# Altium PCB Fonte_Chaveada_ISL6236.PcbDoc
Units mm, origin at the board's own origin, x right, y up, seen from the top; angles counter-clockwise.
Board outline 50 x 50 mm, 6 copper layers (L1, L2(GND), L3, L4, L5(GND), L6), stack 1.297 mm thick; 41 components, 27 nets, 119 pads, 103 vias.
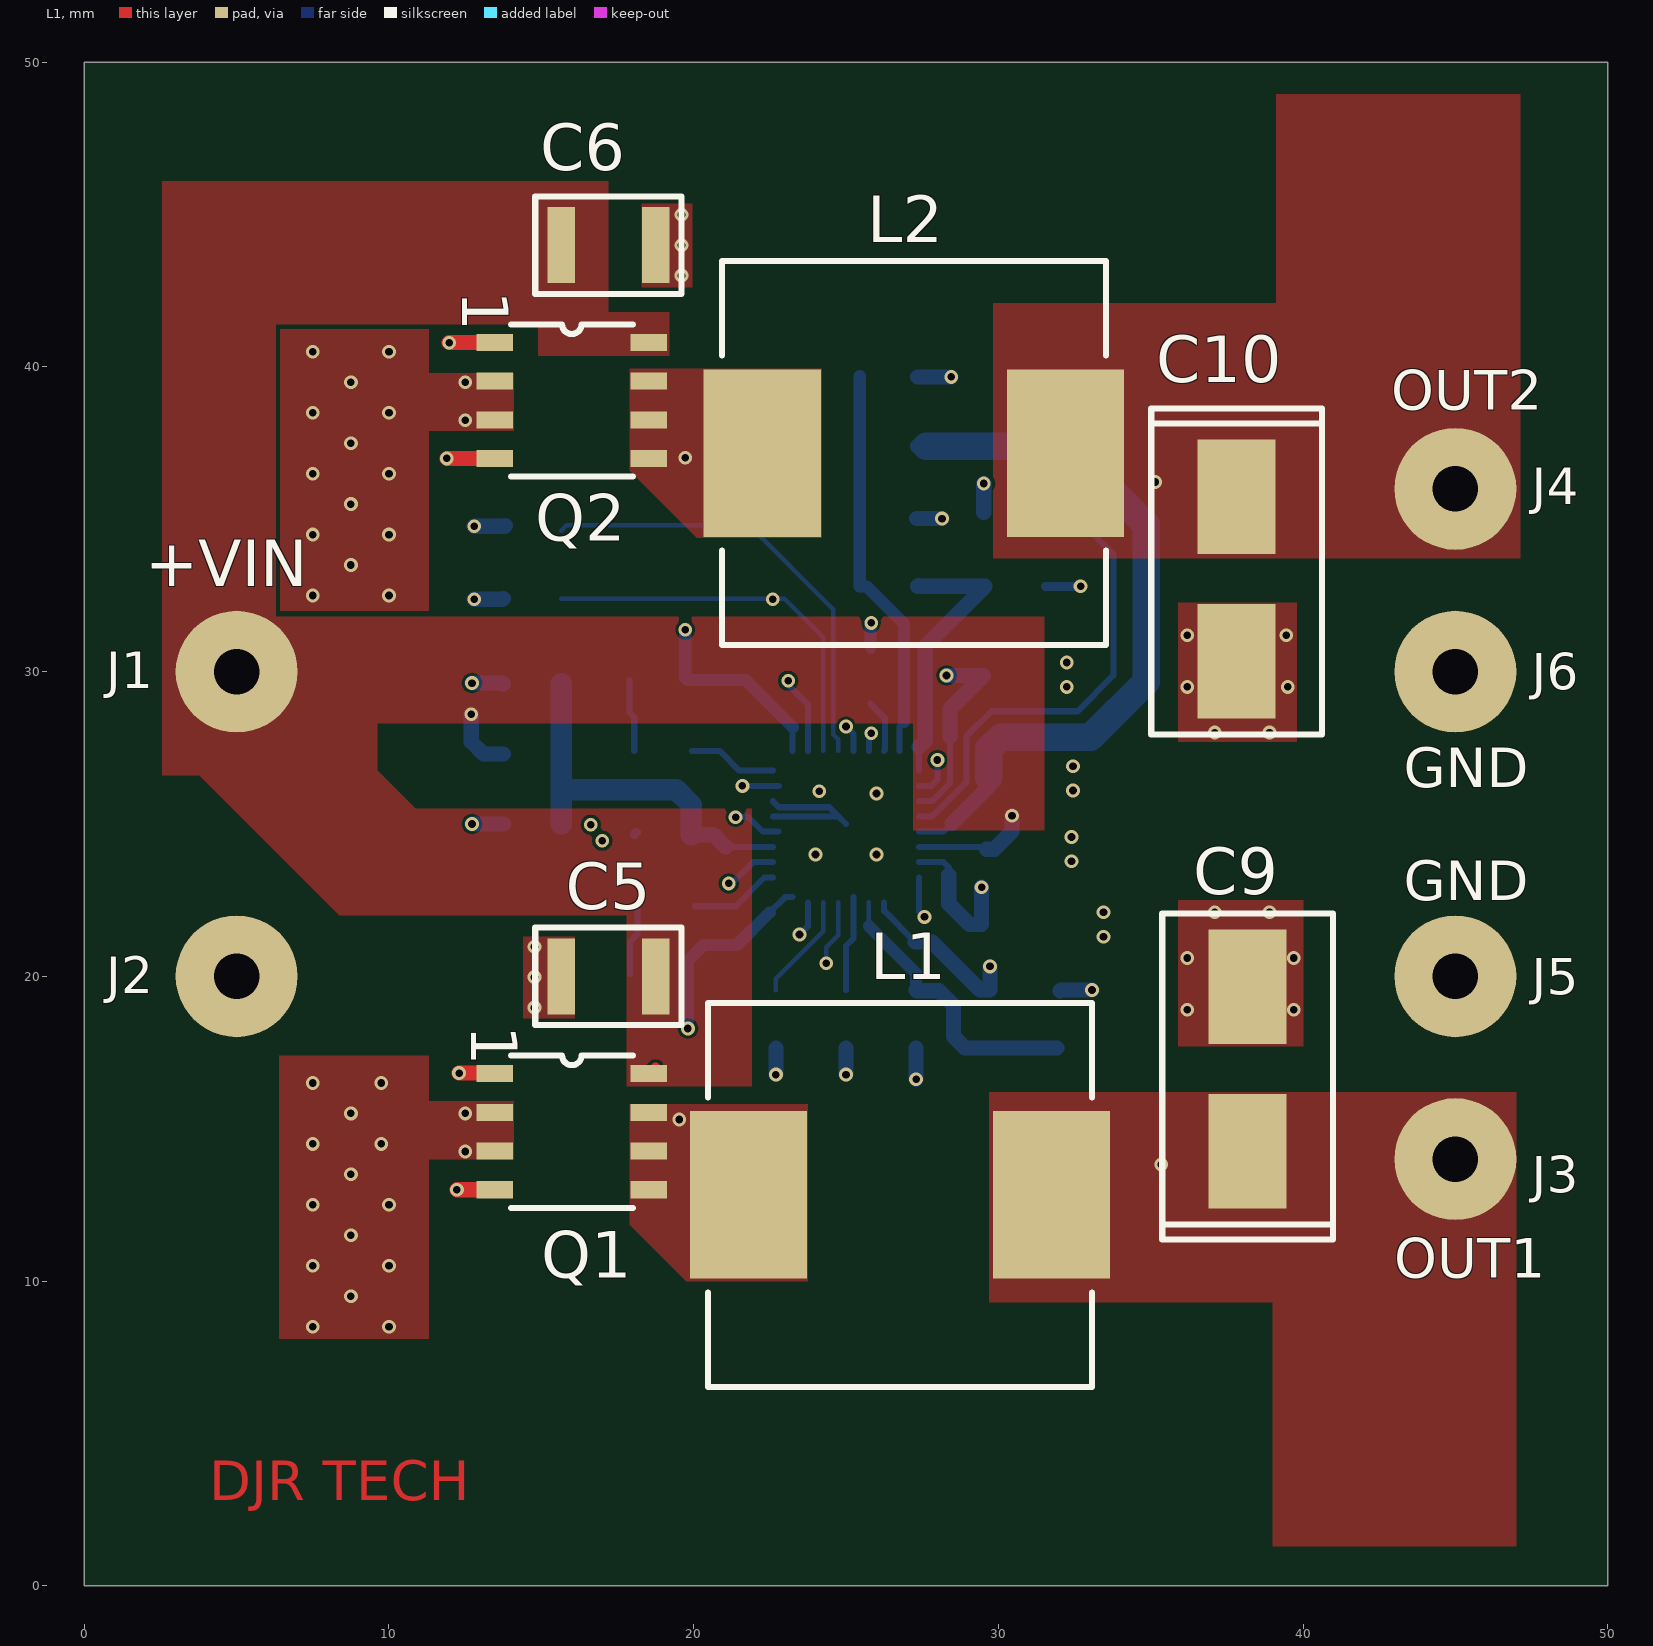
[diagram p0: L1 view]
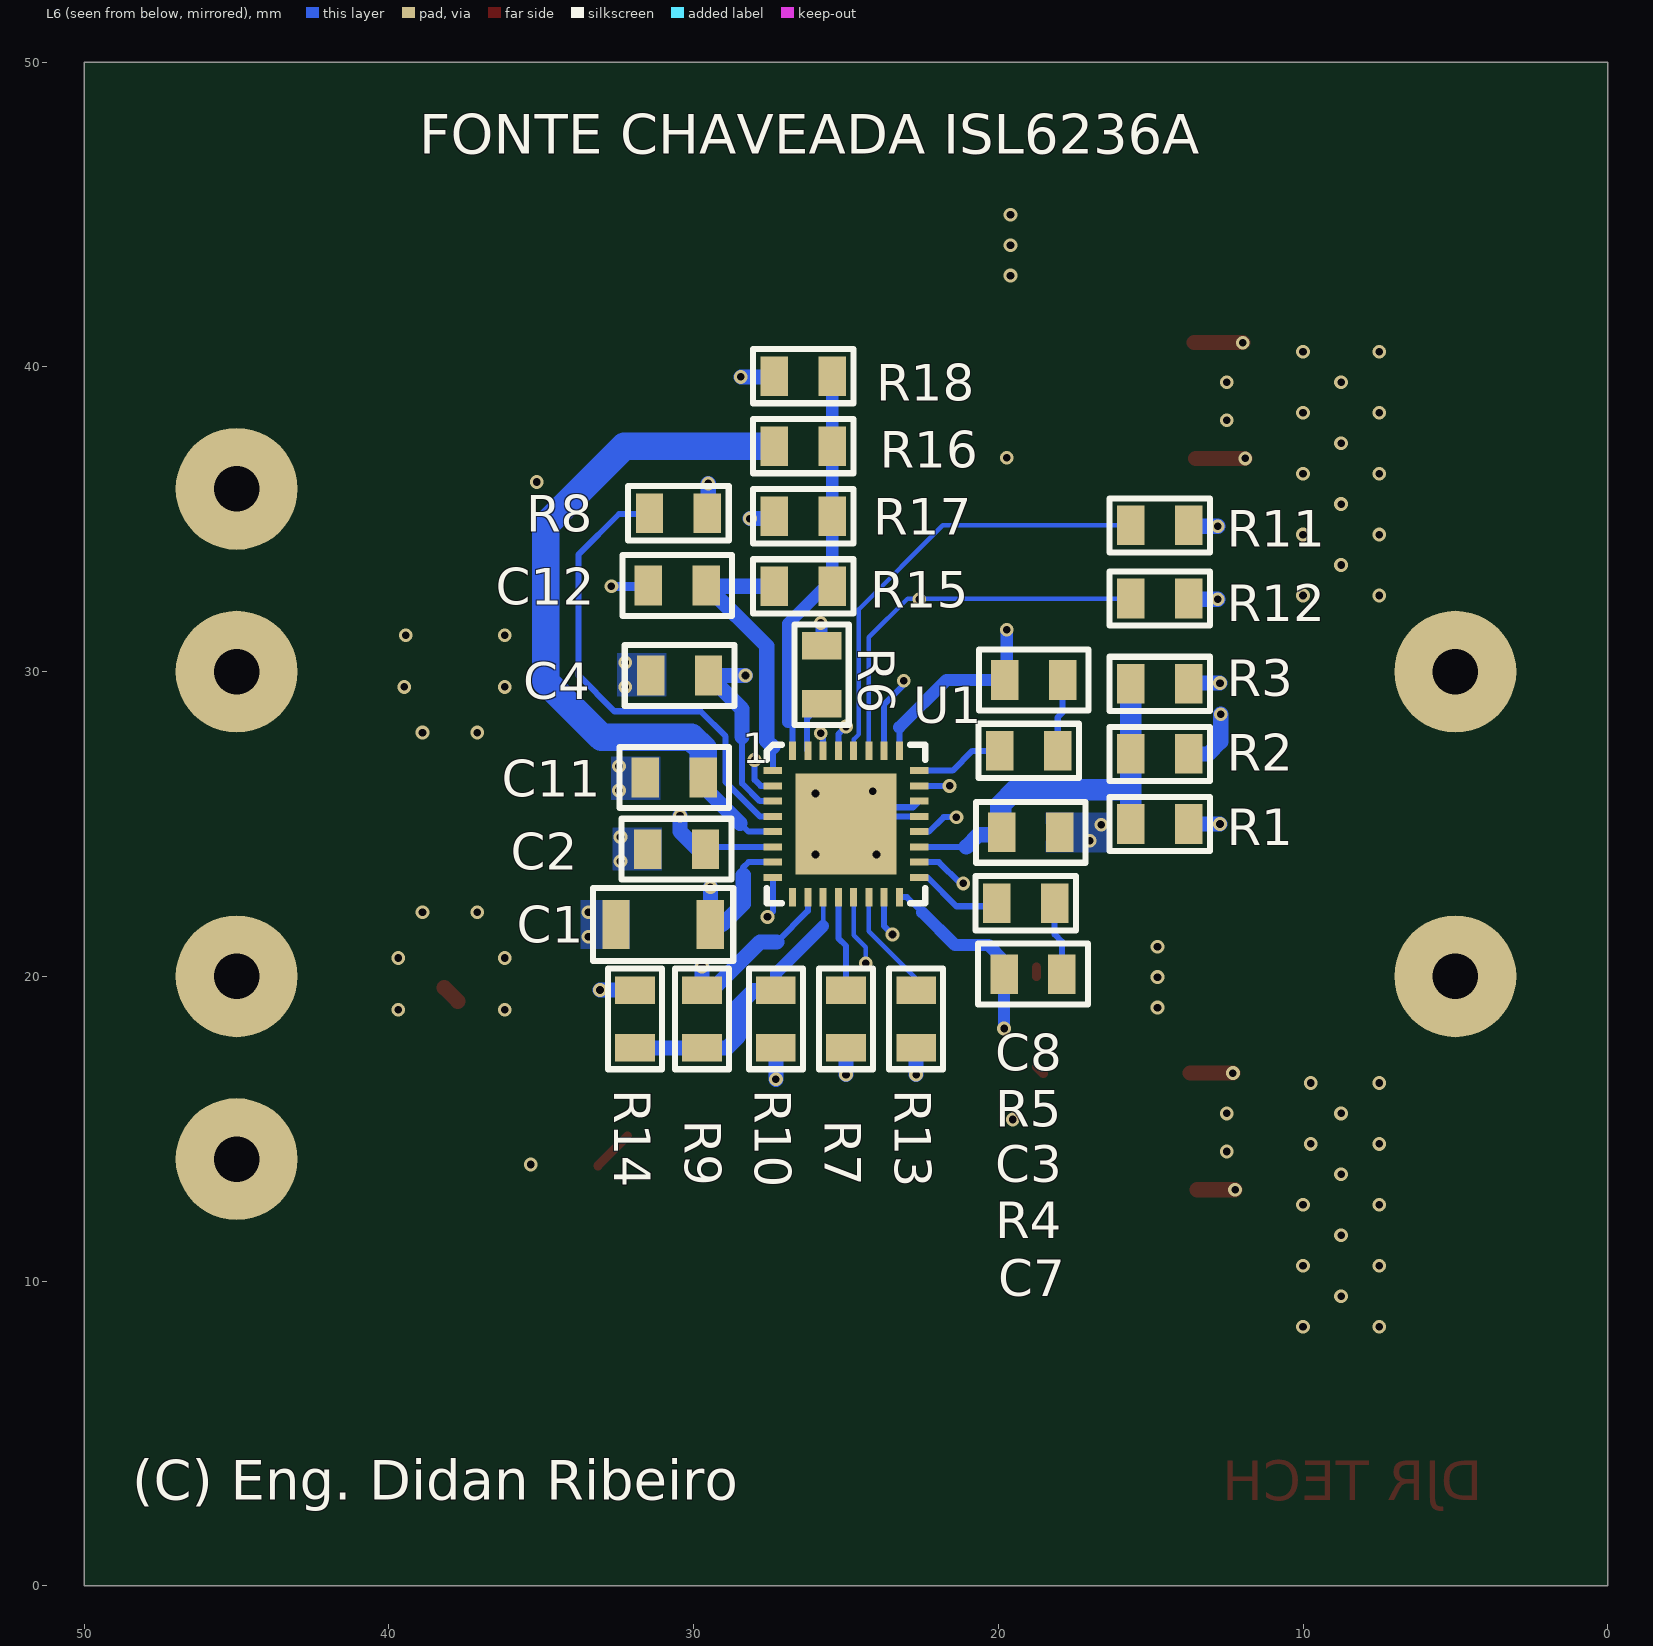
[diagram p1: L6 view, seen from below]
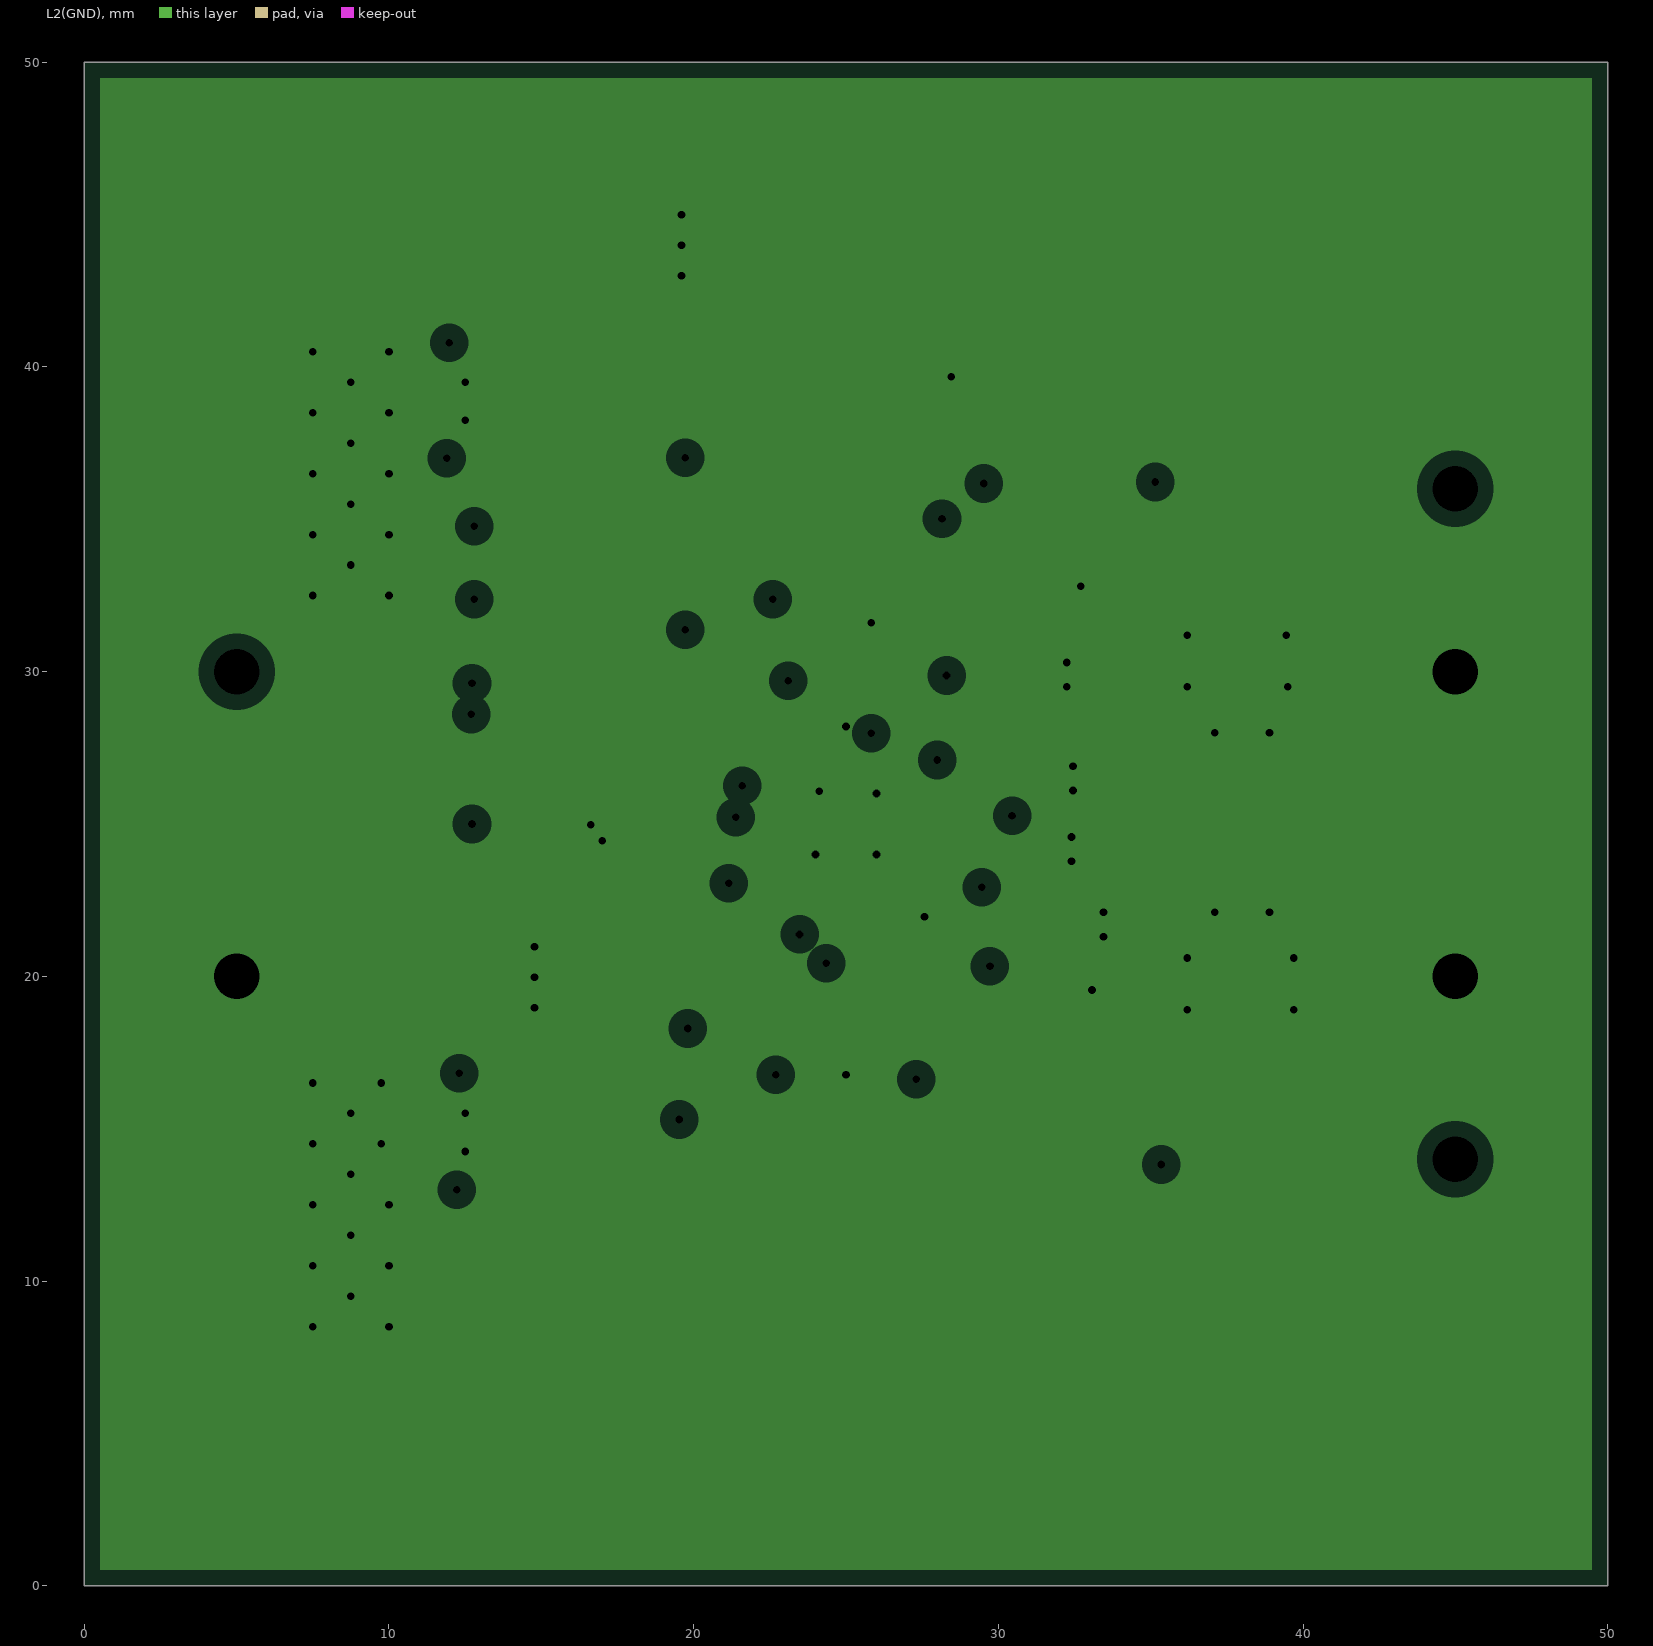
[diagram p2: L2(GND), clearances drawn from the general rule]
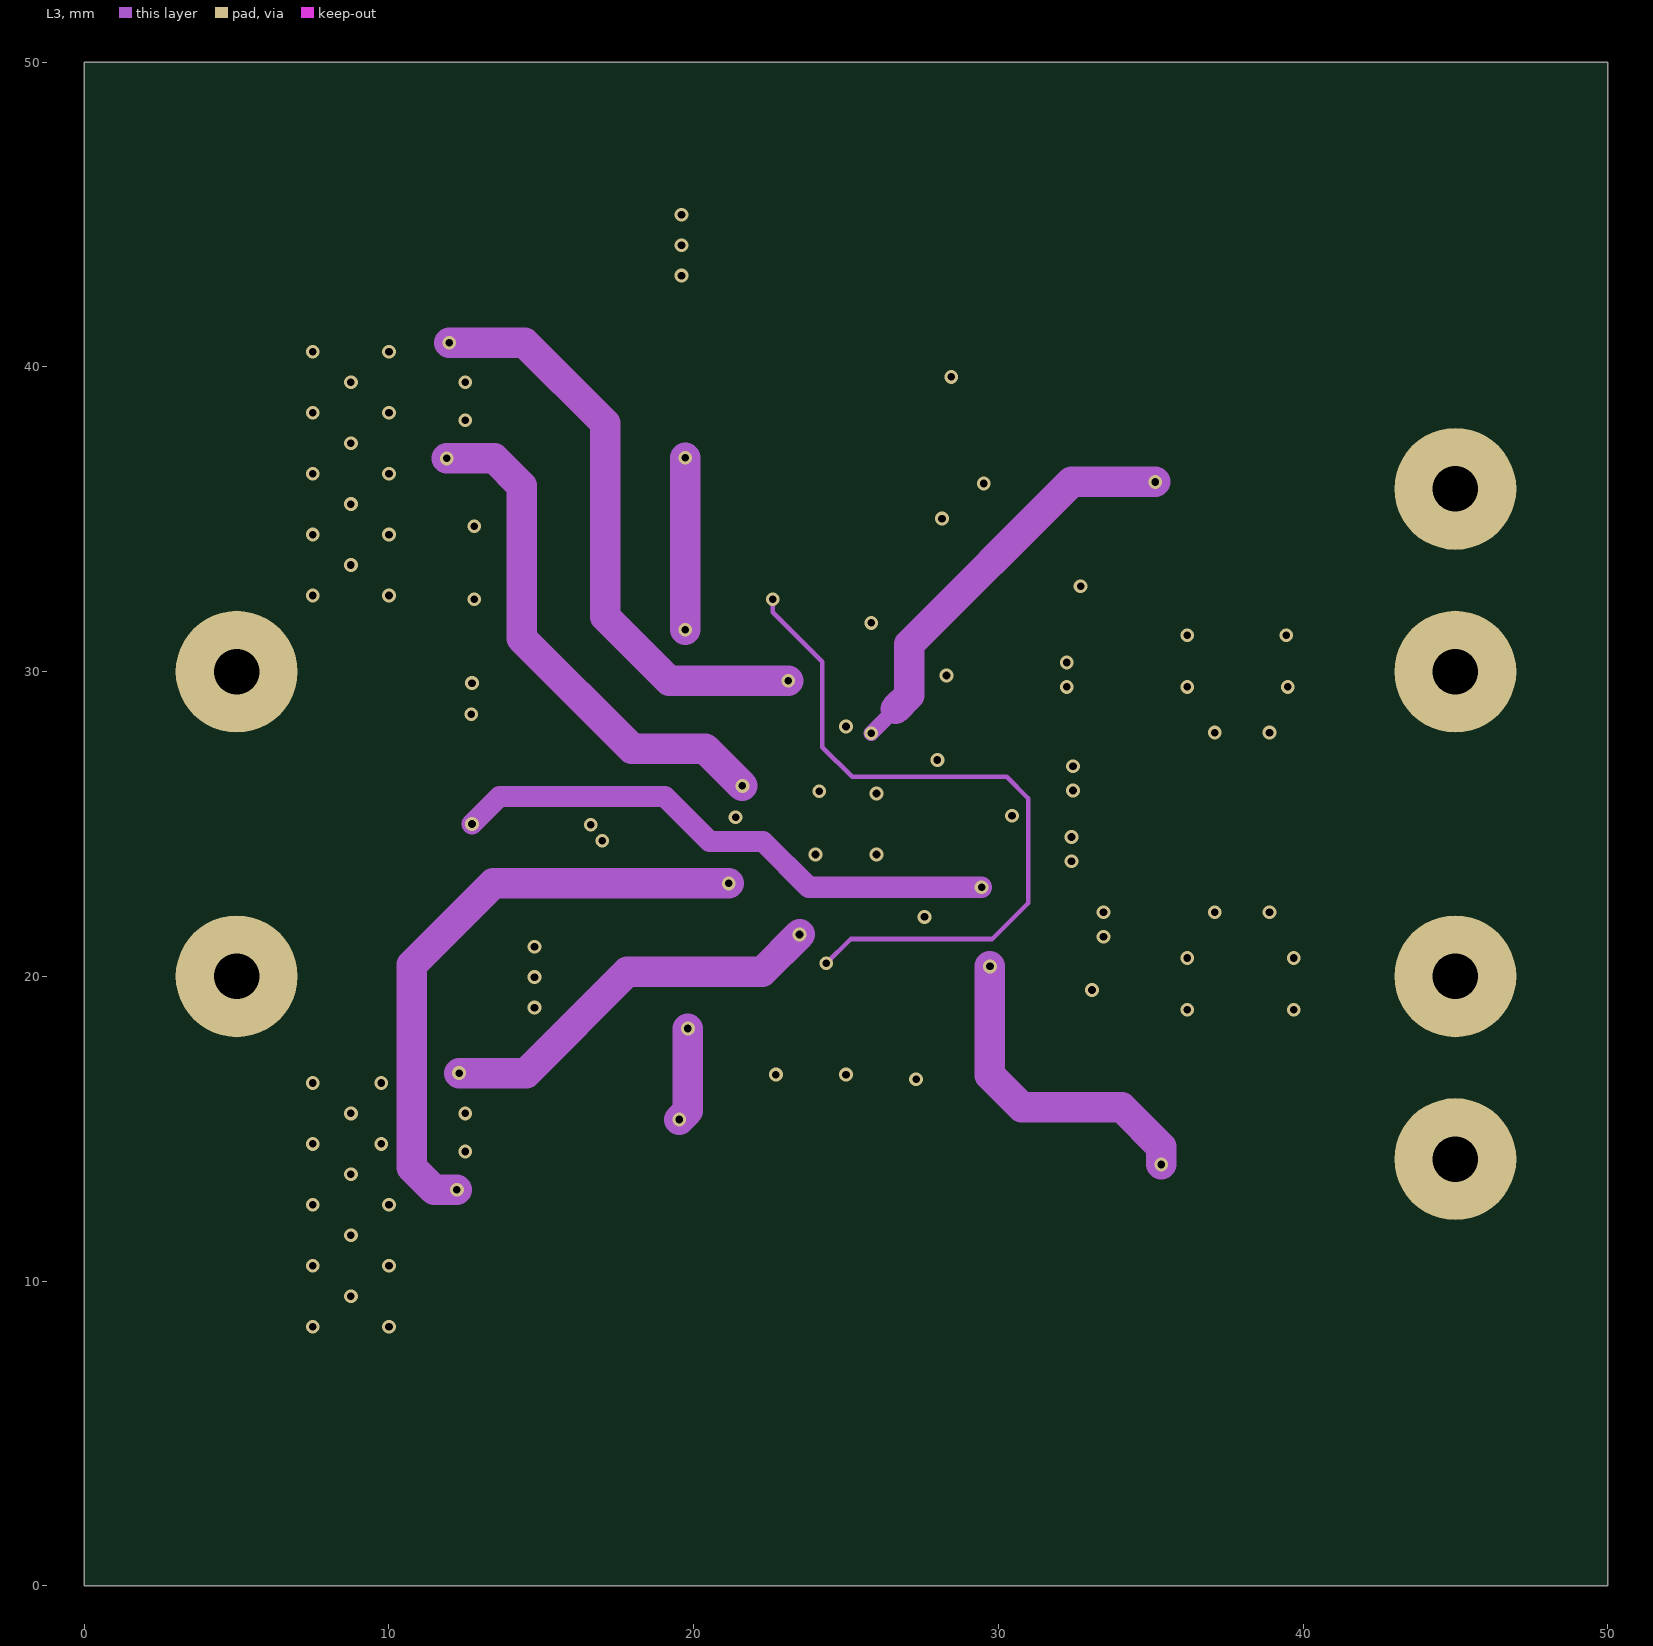
[diagram p3: L3]
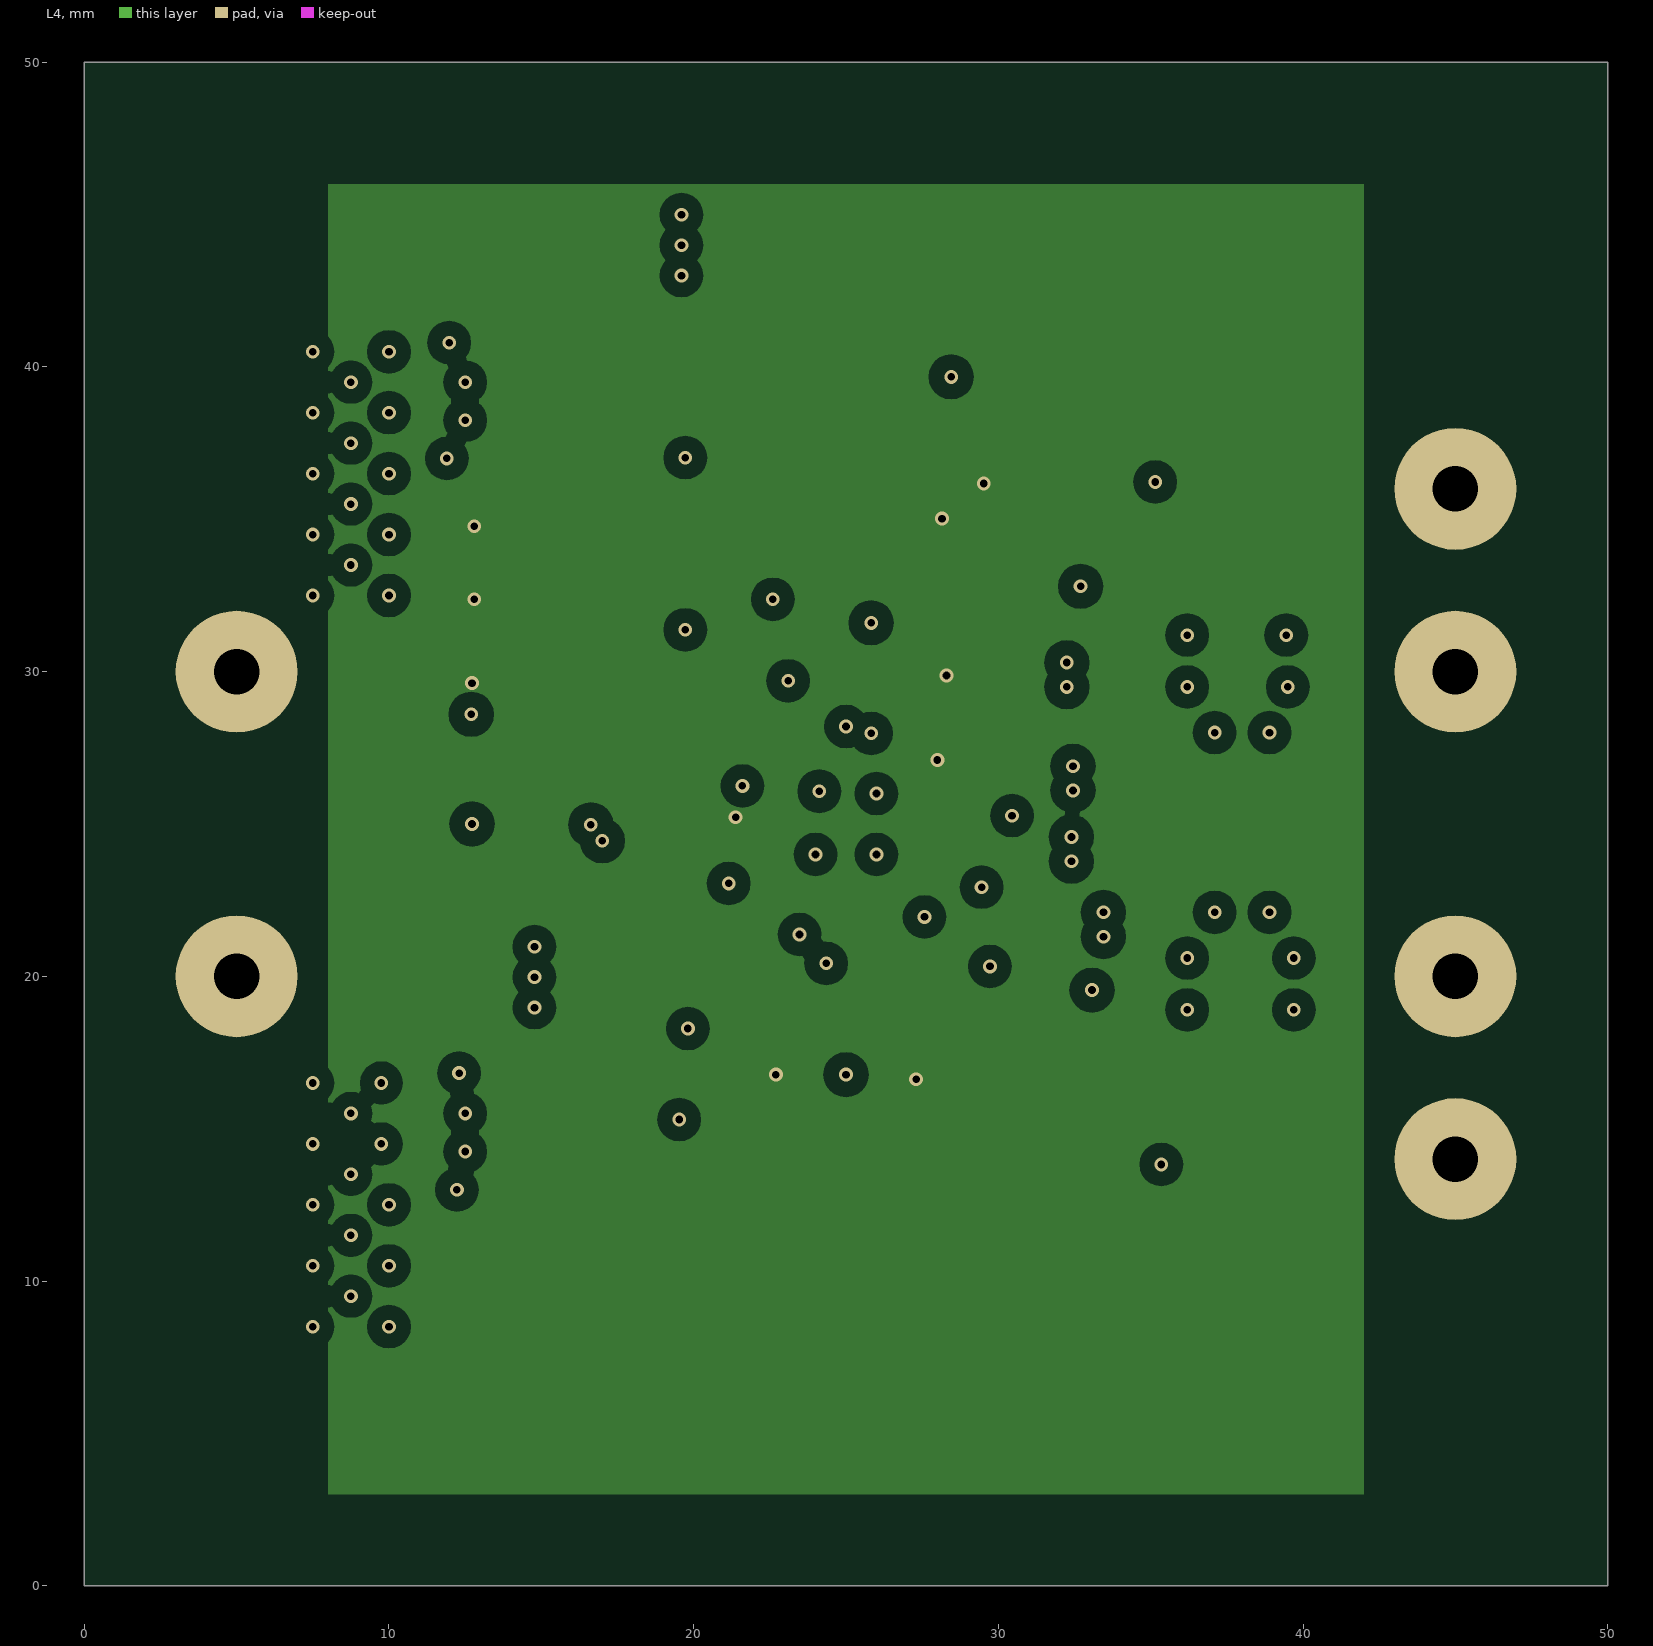
[diagram p4: L4]
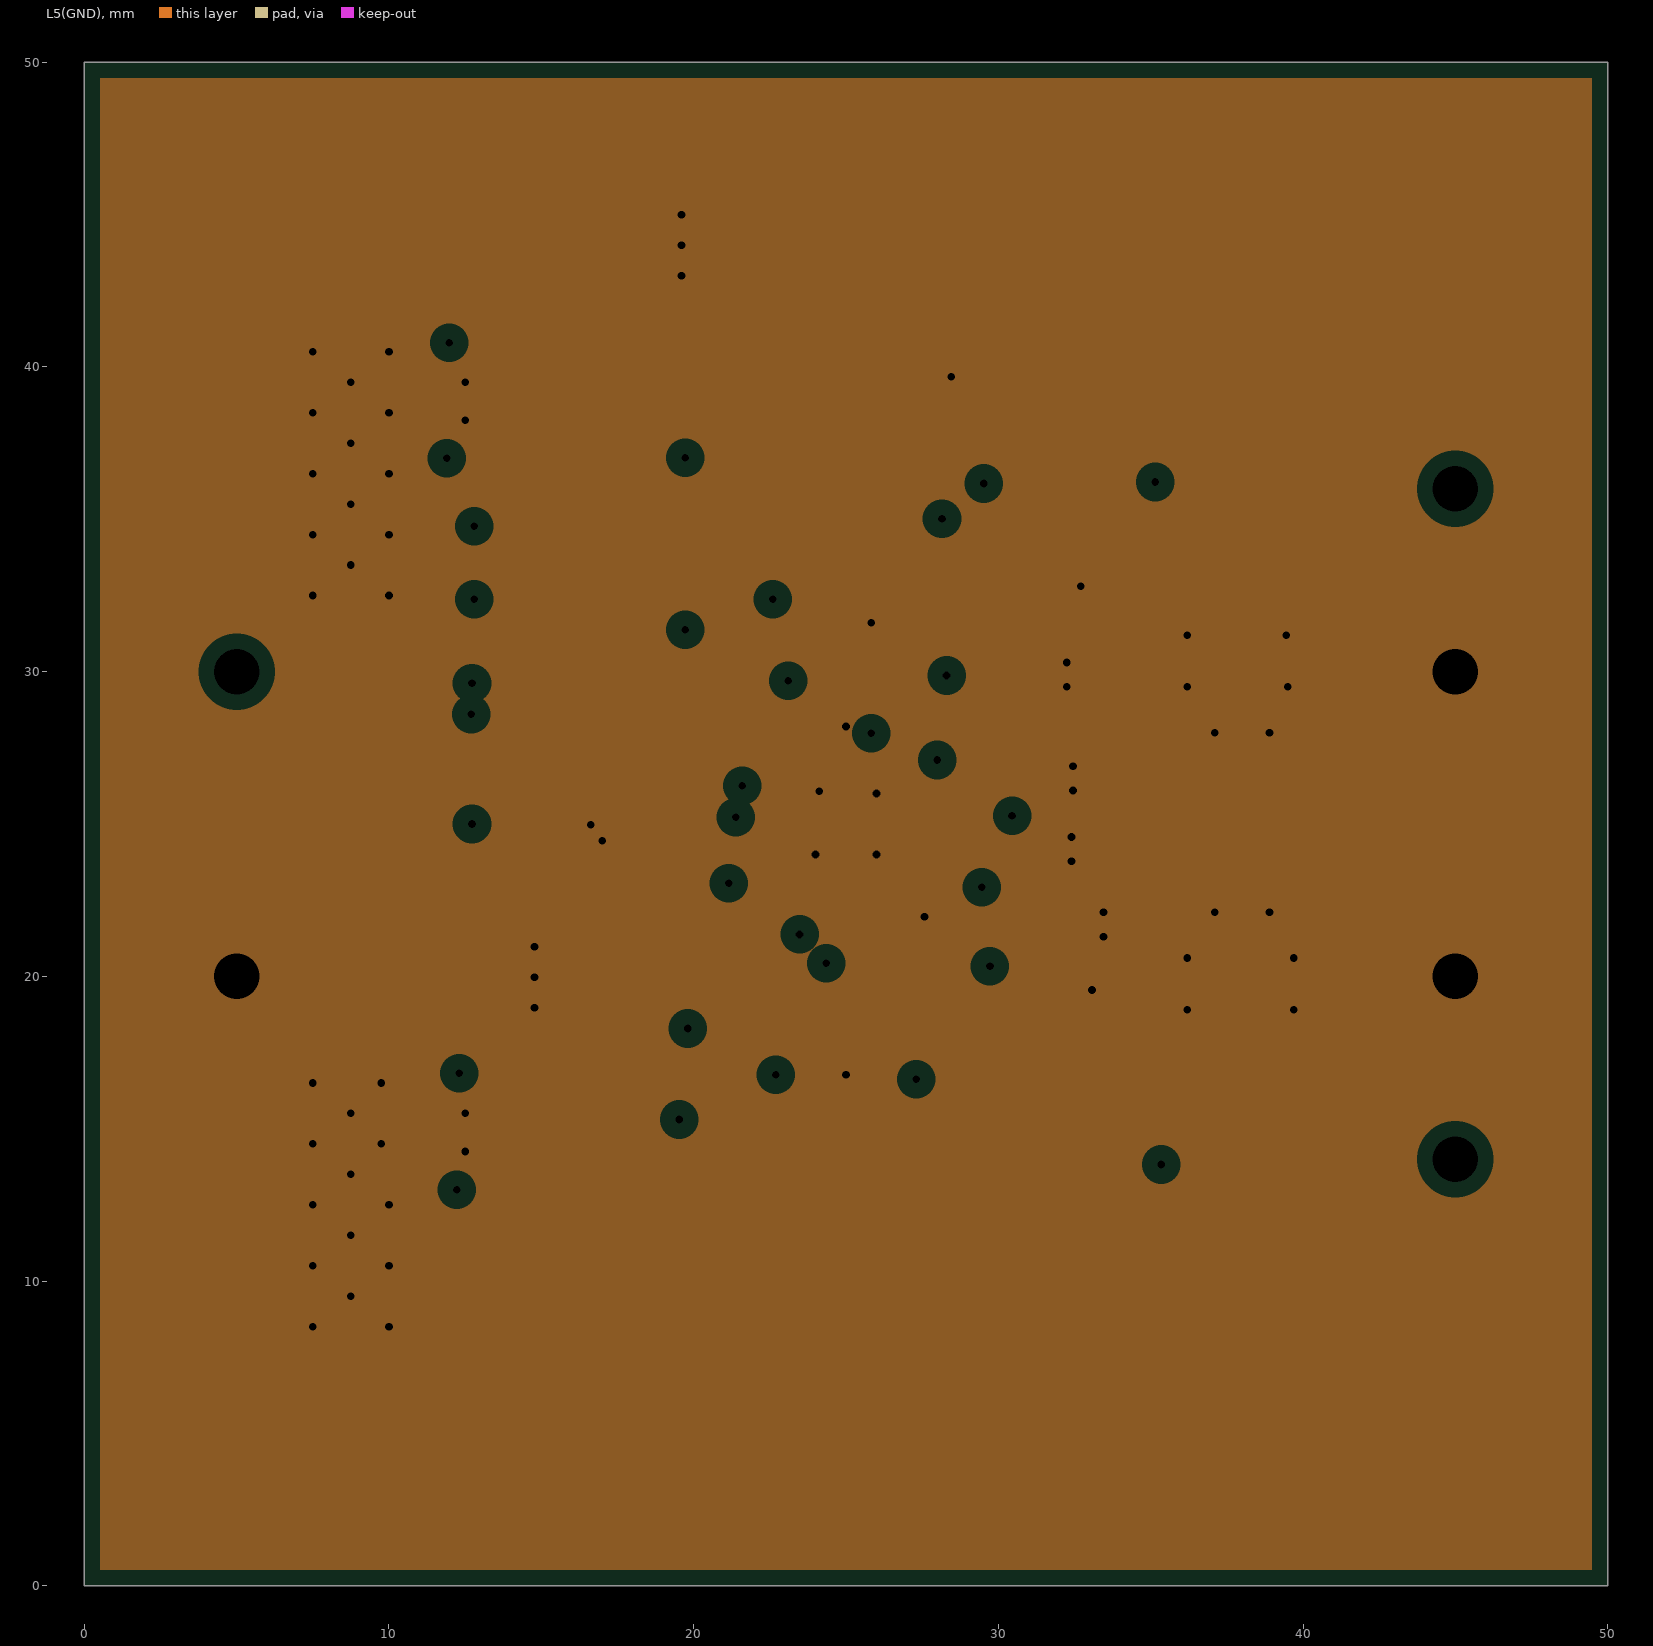
[diagram p5: L5(GND), clearances drawn from the general rule]
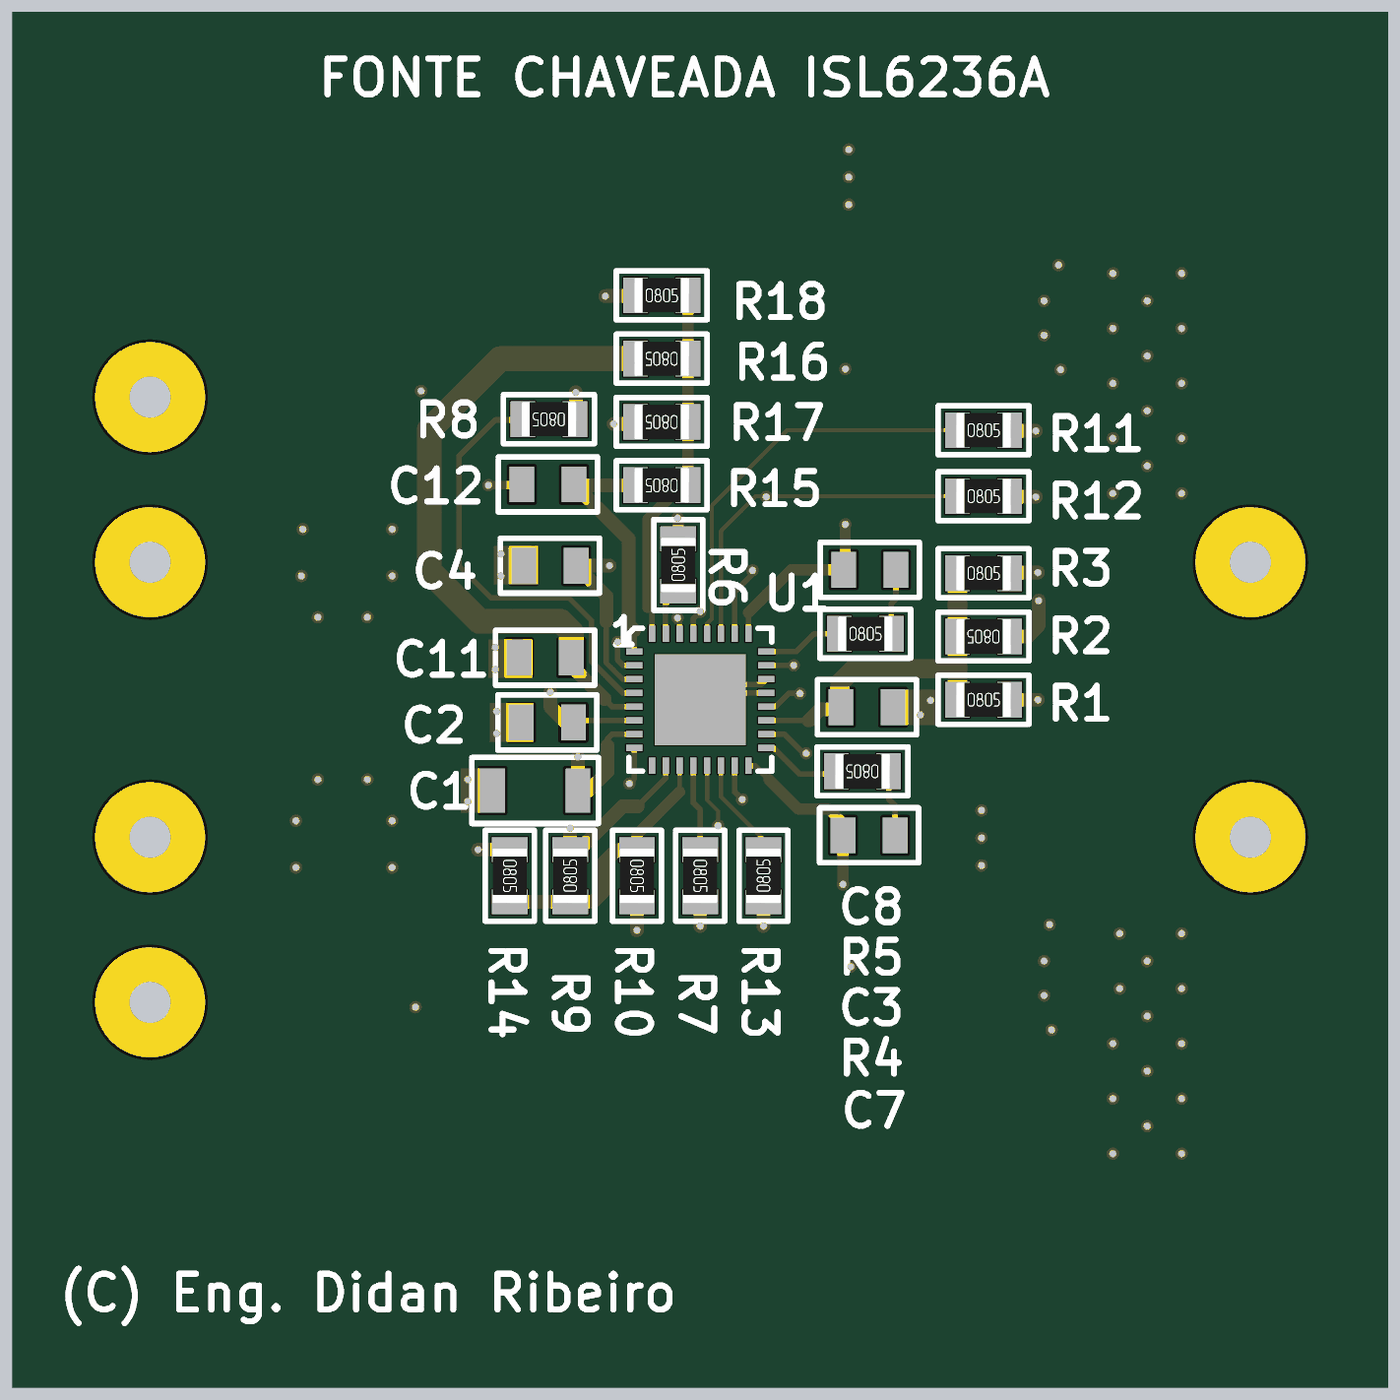
[diagram p6: 3D render of the assembled board from below, using the file's embedded part models]

## Layer stack, top to bottom
Top Solder: solder mask 0.0102, Solder Resist, Dk 3.5
L1: signal copper 0.0356
Dielectric 1: core 0.32, FR-4, Dk 4.8
L2(GND): plane copper 0.036, net GND
Dielectric 3: prepreg 0.127, Dk 4.2
L3: signal copper 0.036
Dielectric 6: core 0.254, Dk 4.2
L4: signal copper 0.036
Dielectric 5: prepreg 0.127, Dk 4.2
L5(GND): plane copper 0.036, net GND
Dielectric 4: core 0.254, Dk 4.2
L6: signal copper 0.0356
Bottom Solder: solder mask 0.0102, Solder Resist, Dk 3.5

## Board outline
0,0 50,0 50,50 0,50

## Design rules (kind name [scope] priority, off if disabled: settings)
Clearance [All] p1: gap=0.1 ignorepadtopadclearanceinfootprint=FALSE
ComponentClearance [All] p1: gap=0.05 collisioncheckmode=3 verticalgap=0.05 showdistances=FALSE
HoleSize [All] p1: absolutevalues=TRUE maxlimit=10 minlimit=0.025 maxpercent=80.000 minpercent=20.000
MinimumSolderMaskSliver [All] p1: minsoldermaskwidth=0
PlaneClearance [All] p1: clearance=0.508
PlaneConnect PlaneConnect_VIA [IsVia] p1: planeconnectstyle=Direct reliefexpansion=0.508 reliefentries=4 reliefconductorwidth=0.254 reliefairgap=0.254
PlaneConnect [All] p2: planeconnectstyle=Direct reliefexpansion=0.508 reliefentries=4 reliefconductorwidth=0.254 reliefairgap=0.254
PolygonConnect [All] p1: connectstyle=Direct reliefconductorwidth=0.254 reliefentries=4 polygonreliefangle="90 Angle" airgapwidth=0.254
RoutingVias [All] p1: holewidth=0.2 width=0.45 viastyle="Through Hole" minholewidth=0.1 minwidth=0.4 maxholewidth=10 maxwidth=10
SilkToSilkClearance [All] p1: silktosilkclearance=0.1
SilkToSolderMaskClearance [IsPad] p1: minsilkscreentomaskgap=0.1 clearancetoexposedcopper=TRUE
SolderMaskExpansion [All] p1: expansion=0.102
Width [All] p1: maxlimit=10 minlimit=0.1 preferedwidth=0.15
23 further rules are at their usual default settings.

## Components (designator, comment, footprint, x,y, rotation, side; value= is the part's Value field where it differs from the comment)
C1 "4.7uF, 10V" C1206 31.1,21.7 r180 bottom
C2 "1uF, 50V" C0805 30.6,24.2 r180 bottom locked
C3 "1uF, 50V" C0805 18.9,24.7 r0 bottom
C4 "1uF, 50V" C0805 30.5,29.9 r180 bottom locked
C5 "10uF, 50V" C1210 17.2,20 r0 top locked
C6 "10uF, 50V" C1210 17.2,44 r180 top locked
C7 "100nF" C0805 18.9,20.1 r180 bottom locked
C8 "220nF" C0805 18.8,29.7 r0 bottom
C9 "330uF, 10V" 7343-43 38,17 r90 top locked
C10 "330uF, 10V" 7343-43 38,33 r270 top locked
C11 "10nF" C0805 30.6,26.5 r0 bottom locked
C12 "100nF" C0805 30.5,32.8 r0 bottom
J1 "4MMx1.5MM" PAD#1 7.925,31.625 r0 top
J2 "4MMx1.5MM" PAD#2 7.725,23.767 r0 top locked
J3 "4MMx1.5MM" PAD#3 45.225,13.475 r0 top
J4 "4MMx1.5MM" PAD#4 45.025,35.575 r0 top
J5 "4MMx1.5MM" PAD#5 45.025,20.475 r0 top
J6 "4MMx1.5MM" PAD#6 45.225,30.475 r0 top
L1 "3u3, DR125-3R3-R" DR125 27,13 r180 top locked
L2 "2u2, DR125-2R2-R" DR125 27,37 r0 top locked
Q1 "SI4816BDY-T1-GE3" SO-8 16,15 r0 top locked
Q2 "SI4816BDY-T1-GE3" SO-8 16,39 r0 top locked
R1 "0R" R0805 14.7,25 r180 bottom
R2 "0R" R0805 14.7,27.3 r0 bottom
R3 "10R" R0805 14.7,29.6 r180 bottom
R4 "1R" R0805 19.1,22.4 r0 bottom
R5 "1R" R0805 19,27.4 r180 bottom
R6 "200k" R0805 25.8,29.9 r90 bottom
R7 "200k" R0805 25,18.6 r270 bottom
R8 "10k" R0805 30.5,35.2 r0 bottom
R9 "DNF" R0805 29.725,18.6 r90 bottom
R10 "0R" R0805 27.3,18.6 r270 bottom
R11 "200k" R0805 14.7,34.8 r180 bottom
R12 "200k" R0805 14.7,32.4 r180 bottom
R13 "10k" R0805 22.7,18.6 r90 bottom
R14 "DNF" R0805 31.925,18.6 r270 bottom
R15 "DNF" R0805 26.4,32.8 r0 bottom locked
R16 "0R" R0805 26.4,37.4 r0 bottom
R17 "DNF" R0805 26.4,35.1 r0 bottom
R18 "DNF" R0805 26.4,39.7 r180 bottom
U1 "ISL6236AIRZ" L32.5x5B 25,25 r180 bottom locked

## Footprints (in the part's own frame and the unit in brackets; to place one, negate y for a bottom-side part, rotate by r counter-clockwise, add the part's x,y. Pads: shape width x height; smd on the part's side, far side on the other; paste and mask are expansions set on the pad)
7343-43 [mm]
  rect 3.75x2.55 smd: 1(-2.74,-0.181) 2(2.66,-0.181)
  silkscreen extent -5.64,-2.98 5.06,2.62
C0805 [mm]
  rect 0.9x1.3 smd: 1(-0.912,-0.027) 2(0.988,-0.027)
  silkscreen extent -1.76,-1.03 1.84,0.97
C1206 [mm]
  rect 0.9x1.6 smd: 1(-1.45,0) 2(1.65,0)
  silkscreen extent -2.2,-1.2 2.4,1.2
C1210 [mm]
  rect 0.9x2.5 smd: 1(-1.55,0) 2(1.55,0)
  silkscreen extent -2.4,-1.6 2.4,1.6
DR125 [mm]
  rect 3.85x5.5 smd: 1(-4.747,0.173) 2(5.203,0.173)
  silkscreen extent -6.07,-6.13 6.53,6.47
L32.5x5B [mm]
  rect 0.6x0.23 smd mask+0.05: 1(-2.4,1.75) 2(-2.4,1.25) 3(-2.4,0.75) 4(-2.4,0.25) 5(-2.4,-0.25) 6(-2.4,-0.75) 7(-2.4,-1.25) 8(-2.4,-1.75) 17(2.4,-1.75) 18(2.4,-1.25) 19(2.4,-0.75) 20(2.4,-0.25) 21(2.4,0.25) 22(2.4,0.75) 23(2.4,1.25) 24(2.4,1.75)
  rect 0.23x0.6 smd mask+0.05: 9(-1.75,-2.4) 10(-1.25,-2.4) 11(-0.75,-2.4) 12(-0.25,-2.4) 13(0.25,-2.4) 14(0.75,-2.4) 15(1.25,-2.4) 16(1.75,-2.4) 25(1.75,2.4) 26(1.25,2.4) 27(0.75,2.4) 28(0.25,2.4) 29(-0.25,2.4) 30(-0.75,2.4) 31(-1.25,2.4) 32(-1.75,2.4)
  rect 3.3x3.3 smd mask+0.05: 33(0,0)
  silkscreen extent -2.6,-2.6 2.6,2.6
PAD#1 [mm]
  round 4 hole 1.5: 1(-2.925,-1.625)
PAD#2 [mm]
  round 4 hole 1.5: 1(-2.725,-3.767)
PAD#3 [mm]
  round 4 hole 1.5: 1(-0.225,0.525)
PAD#4 [mm]
  round 4 hole 1.5: 1(-0.025,0.425)
PAD#5 [mm]
  round 4 hole 1.5: 1(-0.025,-0.475)
PAD#6 [mm]
  round 4 hole 1.5: 1(-0.225,-0.475)
R0805 [mm]
  rect 0.9x1.3 smd mask+0.05: 1(-0.95,0) 2(0.95,0)
  silkscreen extent -1.65,-0.89 1.65,0.89, body extent -1,-0.62 1,0.63, height 0.46
SO-8 [mm]
  rect 1.194x0.559 smd: 1(-2.527,1.805) 2(-2.527,0.535) 3(-2.527,-0.735) 4(-2.527,-2.005) 5(2.527,-2.005) 6(2.527,-0.735) 7(2.527,0.535) 8(2.527,1.805)
  silkscreen extent -2,-2.6 2,2.4

## Part data
C1: library part C3216X5R1A475K, "4.7µF ±10% 10V X5R Ceramic Capacitor -55°C ~ 85°C Surface Mount, MLCC 1206 (3216 Metric) 0.126\" L x 0.063\" W (3.20mm x 1.60mm)", Capacitance=4.7uF, Case/Package=1206, Case Code (Metric)=3216, Dielectric=X5R, Dielectric Material=Ceramic, Manufacturer=TDK, Max Operating Temperature=85°C, Min Operating Temperature=-55°C, Package Quantity=2000, Supplier Part Number 1=445-1386-6-ND, Tolerance=10%, Voltage Rating=10V, Case Code (Imperial)=1206, ComponentLink1Description=https://media.digikey.com/pdf/Data%20Sheets/TDK%20PDFs/C_Series_GeneralAppl_Spec_rev_0.3_201012.pdf, ComponentLink1URL=https://media.digikey.com/pdf/Data%20Sheets/TDK%20PDFs/C_Series_GeneralAppl_Spec_rev_0.3_201012.pdf, ComponentLink2Description=https://www.verical.com/server-webapp/html/getDatasheet?partID=178730, ComponentLink2URL=https://www.verical.com/server-webapp/html/getDatasheet?partID=178730, ComponentLink3Description=http://www.tdk.co.jp/tefe02/e412_c.pdf, ComponentLink3URL=http://www.tdk.co.jp/tefe02/e412_c.pdf, ComponentLink4Description=http://www.mouser.com/ds/2/400/tdk_mlcc_commercial_general_en-542463.pdf, ComponentLink4URL=http://www.mouser.com/ds/2/400/tdk_mlcc_commercial_general_en-542463.pdf, ComponentLink5Description=http://www.farnell.com/datasheets/1571323.pdf, ComponentLink5URL=http://www.farnell.com/datasheets/1571323.pdf, ComponentLink6Description=http://www.onlinecomponents.com/productFiles/mf-TDK/e412_c.pdf, ComponentLink6URL=http://www.onlinecomponents.com/productFiles/mf-TDK/e412_c.pdf, Depth=1.6mm, Lead Free="Lead Free", Length=3.2mm, Manufacturer Part Number=C3216X5R1A475K, Mount="Surface Mount", Number of Pins=2, Packaging="Tape and Reel", Radiation Hardening=No, Stock 1=0, Supplier 1=Digi-Key, Termination=SMD/SMT, Thickness=0.071inch, Voltage Rating (DC)=10V, Width=0.063inch
C2 C3 C4: library part C2012X7R1H105K125AB, "CAP CER 1UF 50V X7R 0805", Capacitance=1uF, Case/Package=0805, Case Code (Metric)=2012, Dielectric=X7R, Dielectric Material=Ceramic, Manufacturer=TDK, Max Operating Temperature=125°C, Min Operating Temperature=-55°C, Package Quantity=1, Supplier Part Number 1=445-7547-6-ND, Tolerance=10%, Voltage Rating=50V, Case Code (Imperial)=0805, ComponentLink1Description=http://www.farnell.com/datasheets/1796654.pdf, ComponentLink1URL=http://www.farnell.com/datasheets/1796654.pdf, ComponentLink2Description=https://product.tdk.com/info/en/catalog/spec/mlccspec_commercial_general_midvoltage_en.pdf, ComponentLink2URL=https://product.tdk.com/info/en/catalog/spec/mlccspec_commercial_general_midvoltage_en.pdf, ComponentLink3Description=http://www.tdk.com/pdf/general_B11.pdf, ComponentLink3URL=http://www.tdk.com/pdf/general_B11.pdf, ComponentLink4Description=http://www.mouser.com/ds/2/400/lcc_commercial_general_en-837201.pdf, ComponentLink4URL=http://www.mouser.com/ds/2/400/lcc_commercial_general_en-837201.pdf, ComponentLink5Description=http://www.farnell.com/datasheets/2291921.pdf, ComponentLink5URL=http://www.farnell.com/datasheets/2291921.pdf, ComponentLink6Description=http://product.tdk.com/capacitor/mlcc/en/documents/mlcc_commercial_general_en.pdf, ComponentLink6URL=http://product.tdk.com/capacitor/mlcc/en/documents/mlcc_commercial_general_en.pdf, Composition=Ceramic, Depth=1.25mm, Height=1.25mm, Lead Free="Lead Free", Length=2mm, Manufacturer Part Number=C2012X7R1H105K125AB, Mount="Surface Mount", Number of Pins=2, Packaging="Tape and Reel", Pricing 1="1=0.42, 10=0.286, 100=0.1619, 500=0.1143, 1000=0.1 (USD)", Radiation Hardening=No, REACH SVHC="No SVHC", Stock 1=20000, Supplier 1=Digi-Key, Termination=SMD/SMT, Thickness=0.057inch, Voltage Rating (DC)=50V, Weight=0.000194oz, Width=0.049inch
C5 C6: library part UMK325BJ106MM-T, "CAP CER 10UF 50V X5R 1210", Capacitance=10uF, Case/Package=1210, Case Code (Metric)=3225, Dielectric=X5R, Manufacturer="Taiyo Yuden", Max Operating Temperature=85°C, Min Operating Temperature=-55°C, Package Quantity=500, Supplier Part Number 1=587-2225-6-ND, Tolerance=20%, Voltage=50V, Case Code (Imperial)=1210, ComponentLink1Description=https://www.yuden.co.jp/productdata/catalog/mlcc01_e.pdf, ComponentLink1URL=https://www.yuden.co.jp/productdata/catalog/mlcc01_e.pdf, ComponentLink2Description=http://www.farnell.com/datasheets/1497285.pdf, ComponentLink2URL=http://www.farnell.com/datasheets/1497285.pdf, ComponentLink3Description=http://www.onlinecomponents.com/productFiles/mf-TAI/1153umk325bj106mm-t.pdf, ComponentLink3URL=http://www.onlinecomponents.com/productFiles/mf-TAI/1153umk325bj106mm-t.pdf, ComponentLink4Description=http://www.yuden.co.jp/ut/product/pdf_html/pdf/mlcc_all_e.pdf, ComponentLink4URL=http://www.yuden.co.jp/ut/product/pdf_html/pdf/mlcc_all_e.pdf, ComponentLink5Description=http://www.yuden.co.jp/ut/product/category/capacitor/UMK325BJ106MM-T.pdf, ComponentLink5URL=http://www.yuden.co.jp/ut/product/category/capacitor/UMK325BJ106MM-T.pdf, ComponentLink6Description=http://www.farnell.com/datasheets/1481447.pdf, ComponentLink6URL=http://www.farnell.com/datasheets/1481447.pdf, Contact Plating=Nickel, Depth=2.5mm, Halogen Free="Halogen Free", Height=2.5mm, Lead Free="Lead Free", Length=3.2mm, Manufacturer Part Number=UMK325BJ106MM-T, Mount="Surface Mount", Number of Pins=2, Packaging="Tape and Reel", Pricing 1="1=0.78, 10=0.554, 100=0.3645 (USD)", Radiation Hardening=No, REACH SVHC=Unknown, Stock 1=0, Supplier 1=Digi-Key, Termination=SMD/SMT, Thickness=0.106inch, Voltage Rating=50V, Voltage Rating (DC)=50V, Width=0.098inch
C7 C12: library part C2012X7R1H104K085AA, "CAP CER 0.1UF 50V X7R 0805", Case/Package=0805, Case Code (Metric)=2012, Dielectric=X7R, Dielectric Material=Ceramic, Manufacturer=TDK, Max Operating Temperature=125°C, Min Operating Temperature=-55°C, Package Quantity=1, Supplier Part Number 1=445-7534-2-ND, Tolerance=10%, Voltage=50V, Capacitance=100nF, Case Code (Imperial)=0805, ComponentLink1Description=http://uk.rs-online.com/webdocs/1532/0900766b81532cd0.pdf, ComponentLink1URL=http://uk.rs-online.com/webdocs/1532/0900766b81532cd0.pdf, ComponentLink2Description=https://product.tdk.com/info/en/catalog/spec/mlccspec_commercial_general_midvoltage_en.pdf, ComponentLink2URL=https://product.tdk.com/info/en/catalog/spec/mlccspec_commercial_general_midvoltage_en.pdf, ComponentLink3Description=http://www.tdk.co.jp/tefe02/e412_c.pdf, ComponentLink3URL=http://www.tdk.co.jp/tefe02/e412_c.pdf, ComponentLink4Description=http://www.farnell.com/datasheets/1571323.pdf, ComponentLink4URL=http://www.farnell.com/datasheets/1571323.pdf, Composition=Ceramic, Depth=1.25mm, Height=0.85mm, Lead Free="Lead Free", Length=2mm, Manufacturer Part Number=C2012X7R1H104K085AA, Mount="Surface Mount", Number of Pins=2, Packaging="Tape and Reel", Pricing 1="4000=0.0274 (USD)", Radiation Hardening=No, REACH SVHC="No SVHC", Stock 1=0, Supplier 1=Digi-Key, Termination=SMD/SMT, Thickness=0.037inch, Voltage Rating=50V, Voltage Rating (DC)=50V, Weight=0.000194oz, Width=0.049inch
C8: library part C2012X7R1H224K125AA, "CAP CER 0.22UF 50V X7R 0805", Case/Package=0805, Case Code (Metric)=2012, Dielectric=X7R, Dielectric Material=Ceramic, Manufacturer=TDK, Max Operating Temperature=125°C, Min Operating Temperature=-55°C, Package Quantity=1, Supplier Part Number 1=445-1350-6-ND, Tolerance=10%, Voltage=50V, Capacitance=220nF, Case Code (Imperial)=0805, ComponentLink1Description=http://www.tdk.co.jp/tefe02/e412_c.pdf, ComponentLink1URL=http://www.tdk.co.jp/tefe02/e412_c.pdf, ComponentLink2Description=https://product.tdk.com/info/en/catalog/spec/mlccspec_commercial_general_midvoltage_en.pdf, ComponentLink2URL=https://product.tdk.com/info/en/catalog/spec/mlccspec_commercial_general_midvoltage_en.pdf, ComponentLink3Description=http://www.farnell.com/datasheets/1571323.pdf, ComponentLink3URL=http://www.farnell.com/datasheets/1571323.pdf, ComponentLink4Description=http://uk.rs-online.com/webdocs/1532/0900766b81532cd0.pdf, ComponentLink4URL=http://uk.rs-online.com/webdocs/1532/0900766b81532cd0.pdf, ComponentLink5Description=http://www.mouser.com/ds/2/400/lcc_commercial_general_en-837201.pdf, ComponentLink5URL=http://www.mouser.com/ds/2/400/lcc_commercial_general_en-837201.pdf, Composition=Ceramic, Depth=1.25mm, Height=1.25mm, Lead Free="Lead Free", Length=2mm, Manufacturer Part Number=C2012X7R1H224K125AA, Mount="Surface Mount", Number of Pins=2, Packaging="Tape and Reel", Pricing 1="1=0.21, 10=0.152, 100=0.0713, 500=0.05, 1000=0.0414 (USD)", Radiation Hardening=No, REACH SVHC="No SVHC", Stock 1=0, Supplier 1=Digi-Key, Termination=SMD/SMT, Thickness=0.057inch, Voltage Rating=50V, Voltage Rating (DC)=50V, Weight=0.000194oz, Width=0.049inch
C9 C10: library part T530X337M010ATE004, "Tantalum Capacitors - Polymer SMD 330uF 10volts 20%", Capacitance=330uF, Case/Package=2917, Case Code (Metric)=7343, ESR (Equivalent Series Resistance)=4mR, Leakage Current=330uA, Manufacturer=KEMET, Max Operating Temperature=125°C, Min Operating Temperature=-55°C, Package Quantity=500, Ripple Current=8.2A, Supplier Part Number 1=399-10378-6-ND, Tolerance=20%, Voltage=10V, Case Code (Imperial)=2917, ComponentLink1Description=https://www.alliedelec.com/m/d/c2b5846d1b4015924ec44504ba06510b.pdf, ComponentLink1URL=https://www.alliedelec.com/m/d/c2b5846d1b4015924ec44504ba06510b.pdf, ComponentLink2Description=http://uk.rs-online.com/webdocs/1529/0900766b815291cb.pdf, ComponentLink2URL=http://uk.rs-online.com/webdocs/1529/0900766b815291cb.pdf, Depth=4.3mm, Dissipation Factor=8%, Features="General Purpose", Height=4mm, Height - Seated (Max)=0.169inch, Length=7.3mm, Life (Hours)=2000Hour, Manufacturer Part Number=T530X337M010ATE004, Mount="PCB,Surface Mount", Packaging="Tape and Reel", Polarity=Polar, Pricing 1="1=6.86, 10=6.095, 100=4.876 (USD)", REACH SVHC="No SVHC", Stock 1=0, Supplier 1=Digi-Key, Termination=SMD/SMT, Voltage Rating=10V, Voltage Rating (DC)=10V, Width=4.3mm
C11: library part VJ0805Y103KNAAO, "CAP CER 10000PF 50V X7R 0805", Case/Package=0805, Case Code (Metric)=2012, Dielectric=X7R, Manufacturer="Vishay Vitramon", Max Operating Temperature=125°C, Min Operating Temperature=-55°C, Package Quantity=1, Supplier Part Number 1=720-1244-1-ND, Tolerance=10%, Voltage=50V, Capacitance=10nF, Case Code (Imperial)=0805, ComponentLink1Description=http://www.vishay.com/docs/45128/nonmagneticepoxybond.pdf, ComponentLink1URL=http://www.vishay.com/docs/45128/nonmagneticepoxybond.pdf, ComponentLink2Description=http://www.farnell.com/datasheets/1805046.pdf, ComponentLink2URL=http://www.farnell.com/datasheets/1805046.pdf, Depth=1.25mm, Height=1.45mm, Length=2mm, Manufacturer Part Number=VJ0805Y103KNAAO, Mount="Surface Mount", Packaging="Tape and Reel", Pricing 1="1=0.88, 10=0.65, 100=0.4457 (USD)", Radiation Hardening=No, REACH SVHC=Unknown, Stock 1=211, Supplier 1=Digi-Key, Termination=SMD/SMT, Thickness=0.057inch, Voltage Rating=50V, Voltage Rating (DC)=50V, Width=0.049inch
J1 J2 J3 J4 J5 J6: library part "PAD com furo"
L1: library part DR125-3R3-R, "COILTRONICS   DR125-3R3-R   Surface Mount Power Inductor, DR Series, 3.3 H,  20%, Shielded, 9.26 A", Case/Package=0125, DC Resistance (DCR)=6.3mR, Inductance=3.3uh, Inductance Tolerance=20%, Manufacturer="Eaton Coiltronics", Max DC Current=12.7A, Max Operating Temperature=125°C, Min Operating Temperature=-40°C, Package Quantity=600, RMS Current (Irms)=9.26A, Self Resonant Frequency=100kHz, Supplier Part Number 1=513-1529-6-ND, ComponentLink1Description=http://www.farnell.com/datasheets/87246.pdf, ComponentLink1URL=http://www.farnell.com/datasheets/87246.pdf, Core Material=Ferrite, Depth=12.5mm, Height=6mm, Lead Free="Lead Free", Length=12.5mm, Manufacturer Part Number=DR125-3R3-R, Military Standard=Not, Mount="Surface Mount", Number of Pins=2, Packaging="Tape and Reel", Pricing 1="1=2.03, 10=1.873, 100=1.3113 (USD)", Radiation Hardening=No, REACH SVHC="No SVHC", Saturation Current=12.7A, Shielding=Shielded, Stock 1=4659, Supplier 1=Digi-Key, Termination=SMD/SMT, Test Frequency=100kHz, Tolerance=20%, Weight=0.144oz, Width=12.5mm
L2: library part DR125-2R2-R, "Fixed Inductors 2.2uH 15A 0.0045ohms", Case/Package=Nonstandard, Current Rating=10.9A, DC Resistance (DCR)=4.5mR, Inductance=2.2uh, Inductance Tolerance=20%, Manufacturer="Eaton Cooper", Max Operating Temperature=125°C, Min Operating Temperature=-40°C, Package Quantity=600, Saturation Current=15A, Self Resonant Frequency=100kHz, Supplier Part Number 1=513-1662-6-ND, ComponentLink1Description=https://www.verical.com/server-webapp/html/getDatasheet?partID=571249, ComponentLink1URL=https://www.verical.com/server-webapp/html/getDatasheet?partID=571249, ComponentLink2Description=http://uk.rs-online.com/webdocs/116a/0900766b8116a153.pdf, ComponentLink2URL=http://uk.rs-online.com/webdocs/116a/0900766b8116a153.pdf, ComponentLink3Description=http://www.farnell.com/datasheets/87246.pdf, ComponentLink3URL=http://www.farnell.com/datasheets/87246.pdf, Composition=Wirewound, Core Material=Ferrite, DC Current=10.9A, Depth=12.5mm, Height=6mm, Height - Seated (Max)=0.236inch, Lead Free="Lead Free", Length=12.5mm, Manufacturer Part Number=DR125-2R2-R, Max DC Current=10.9A, Military Standard=Not, Mount="Surface Mount", Number of Pins=2, Packaging="Tape and Reel", Pricing 1="1=2.03, 10=1.873, 100=1.3113 (USD)", Radiation Hardening=No, REACH SVHC="No SVHC", RMS Current (Irms)=10.9A, Shielding=Shielded, Stock 1=175, Supplier 1=Digi-Key, Termination=SMD/SMT, Test Frequency=100kHz, Tolerance=20%, Weight=0.144oz, Width=0.492inch
Q1 Q2: "MOSFET 2N-CH 30V 5.8A 8-SOIC", Case/Package=SO, Continuous Drain Current (ID)=5.8A, Drain to Source Resistance=9.3mR, Drain to Source Voltage (Vdss)=30V, Gate to Source Voltage (Vgs)=20V, Manufacturer="Vishay Siliconix", Max Operating Temperature=150°C, Max Power Dissipation=1.25W, Min Operating Temperature=-55°C, On-State Resistance=18.5mR, Package Quantity=1, Supplier Part Number 1=SI4816BDY-T1-GE3DKR-ND, Threshold Voltage=3V, ComponentLink1Description=http://www.farnell.com/datasheets/1911984.pdf, ComponentLink1URL=http://www.farnell.com/datasheets/1911984.pdf, ComponentLink2Description=http://www.farnell.com/datasheets/2049212.pdf, ComponentLink2URL=http://www.farnell.com/datasheets/2049212.pdf, ComponentLink3Description=http://www.vishay.com/docs/73026/si4816bd.pdf, ComponentLink3URL=http://www.vishay.com/docs/73026/si4816bd.pdf, ComponentLink4Description=http://datasheet.iiic.cc/vishay_[siliconix]/SI4816BDY-T1-GE3.pdf, ComponentLink4URL=http://datasheet.iiic.cc/vishay_[siliconix]/SI4816BDY-T1-GE3.pdf, Contact Plating=Matte,Tin, Fall Time=9ns, FET Type="2 N-Channel", Height=1.55mm, Lead Free="Lead Free", Length=5mm, Manufacturer Part Number=SI4816BDY-T1-GE3, Mount="Surface Mount", Number of Channels=2, Number of Elements=2, Number of Pins=8, Packaging="Tape and Reel", Pricing 1="1=1.86, 10=1.681, 100=1.3511, 500=1.0509, 1000=0.8707 (USD)", Radiation Hardening=No, Rds On Max=18.5mR, REACH SVHC="No SVHC", Rise Time=9ns, Stock 1=0, Supplier 1=Digi-Key, Turn-Off Delay Time=31ns, Turn-On Delay Time=13ns, Weight=0.006596oz, Width=4mm
R1 R2 R10 R16: library part ERJ6GEY0R00V, "Res Thick Film 0805 0 Ohm Molded SMD SMD Embossed Carrier T/R", Case/Package=0805, Case Code (Metric)=2012, Current Rating=2A, Manufacturer=Panasonic, Max Operating Temperature=155°C, Max Power Dissipation=125mW, Min Operating Temperature=-55°C, Package Quantity=1, Resistance=0mR, Supplier Part Number 1=P0.0ACT-ND, Temperature Coefficient=600ppm/°C, Tolerance=5%, Voltage Rating=150V, Case Code (Imperial)=0805, ComponentLink1Description=http://www.farnell.com/datasheets/1678796.pdf, ComponentLink1URL=http://www.farnell.com/datasheets/1678796.pdf, ComponentLink2Description=http://www.farnell.com/datasheets/2371628.pdf, ComponentLink2URL=http://www.farnell.com/datasheets/2371628.pdf, ComponentLink3Description=http://industrial.panasonic.com/www-data/pdf/AOA0000/AOA0000CE1.pdf, ComponentLink3URL=http://industrial.panasonic.com/www-data/pdf/AOA0000/AOA0000CE1.pdf, ComponentLink4Description=http://industrial.panasonic.com/www-cgi/jvcr13pz.cgi?E+PZ+3+AOA0001+ERJ6GEY0R00V+7+WW, ComponentLink4URL=http://industrial.panasonic.com/www-cgi/jvcr13pz.cgi?E+PZ+3+AOA0001+ERJ6GEY0R00V+7+WW, Composition="Thick Film", Contact Plating=Tin, Depth=1.25mm, Features="Automotive AEC-Q200", Height=0.6mm, Lead Free="Lead Free", Length=2mm, Manufacturer Part Number=ERJ6GEY0R00V, Military Standard=Not, Mount="Surface Mount", Number of Terminations=2, Packaging="Tape and Reel", Power Rating=125mW, Pricing 1="1=0.1, 10=0.06, 25=0.0432, 50=0.033, 100=0.0243, 250=0.0185, 500=0.0148, 1000=0.0109 (USD)", Radiation Hardening=No, REACH SVHC="No SVHC", Stock 1=6984745, Supplier 1=Digi-Key, Termination=SMD/SMT, Voltage Rating (DC)=150V, Width=1.25mm
R3: library part ERJ6GEYJ100V, "Res Thick Film 0805 10 Ohm 5% 0.125W(1/8W) ±200ppm/C Molded SMD Automotive Punched T/R", Case/Package=0805, Case Code (Metric)=2012, Manufacturer=Panasonic, Max Operating Temperature=155°C, Max Power Dissipation=125mW, Min Operating Temperature=-55°C, Package Quantity=5000, Supplier Part Number 1=P10ADKR-ND, Temperature Coefficient=200ppm/°C, Tolerance=5%, Voltage Rating=150V, Case Code (Imperial)=0805, ComponentLink1Description=https://www.verical.com/server-webapp/html/getDatasheet?partID=247141, ComponentLink1URL=https://www.verical.com/server-webapp/html/getDatasheet?partID=247141, ComponentLink2Description=http://industrial.panasonic.com/www-data/pdf/AOA0000/AOA0000CE1.pdf, ComponentLink2URL=http://industrial.panasonic.com/www-data/pdf/AOA0000/AOA0000CE1.pdf, ComponentLink3Description=https://www.alliedelec.com/m/d/51cd0790071e1666bdb9d00c57fcf960.pdf, ComponentLink3URL=https://www.alliedelec.com/m/d/51cd0790071e1666bdb9d00c57fcf960.pdf, ComponentLink4Description=http://www.farnell.com/datasheets/1500035.pdf, ComponentLink4URL=http://www.farnell.com/datasheets/1500035.pdf, ComponentLink5Description=http://www.jameco.com/Jameco/Products/ProdDS/1989615.pdf, ComponentLink5URL=http://www.jameco.com/Jameco/Products/ProdDS/1989615.pdf, ComponentLink6Description=http://www.farnell.com/datasheets/2371628.pdf, ComponentLink6URL=http://www.farnell.com/datasheets/2371628.pdf, Composition="Thick Film", Contact Plating=Tin, Depth=1.25mm, Height=0.6mm, Lead Free="Lead Free", Length=2mm, Manufacturer Part Number=ERJ6GEYJ100V, Military Standard=Not, Mount="Surface Mount", Number of Terminations=2, Packaging="Tape and Reel", Power Rating=125mW, Pricing 1="1=0.1, 10=0.061, 100=0.0249, 1000=0.0112, 2500=0.0097 (USD)", Radiation Hardening=No, REACH SVHC="No SVHC", Resistance=10R, Stock 1=631964, Supplier 1=Digi-Key, Termination=SMD/SMT, Voltage Rating (DC)=150V, Width=0.049inch, Working Voltage=150V
R4 R5: library part ERJ6RQF1R0V, "Res Thick Film 0805 1 Ohm 1% 0.125W(1/8W) ±200ppm/C Molded SMD Automotive Punched T/R", Case/Package=0805, Case Code (Metric)=2012, Manufacturer=Panasonic, Max Operating Temperature=125°C, Max Power Dissipation=125mW, Min Operating Temperature=-55°C, Package Quantity=5000, Supplier Part Number 1=P1.0DDKR-ND, Temperature Coefficient=200ppm/°C, Tolerance=1%, Case Code (Imperial)=0805, ComponentLink1Description=http://uk.rs-online.com/webdocs/13b8/0900766b813b869e.pdf, ComponentLink1URL=http://uk.rs-online.com/webdocs/13b8/0900766b813b869e.pdf, ComponentLink2Description=http://www.farnell.com/datasheets/391509.pdf, ComponentLink2URL=http://www.farnell.com/datasheets/391509.pdf, ComponentLink3Description=https://www.alliedelec.com/m/d/343577d27580f3e2a275b8e77c10f6b8.pdf, ComponentLink3URL=https://www.alliedelec.com/m/d/343577d27580f3e2a275b8e77c10f6b8.pdf, ComponentLink4Description=http://industrial.panasonic.com/www-data/pdf/AOA0000/AOA0000CE3.pdf, ComponentLink4URL=http://industrial.panasonic.com/www-data/pdf/AOA0000/AOA0000CE3.pdf, ComponentLink5Description=http://www.jameco.com/Jameco/Products/ProdDS/1381829.pdf, ComponentLink5URL=http://www.jameco.com/Jameco/Products/ProdDS/1381829.pdf, Composition="Thick Film", Contact Plating=Tin, Depth=1.25mm, Height=0.6mm, Lead Free="Lead Free", Length=2mm, Manufacturer Part Number=ERJ6RQF1R0V, Military Standard=Not, Mount="Surface Mount", Number of Pins=2, Number of Terminations=2, Packaging="Tape and Reel", Power Rating=125mW, Pricing 1="1=0.37, 10=0.311, 25=0.2264, 50=0.1642, 100=0.1217, 250=0.0934, 500=0.0736, 1000=0.0509 (USD)", Radiation Hardening=No, REACH SVHC="No SVHC", Resistance=1R, Stock 1=71693, Supplier 1=Digi-Key, Termination=SMD/SMT, Width=1.2mm
R6 R7 R11 R12: library part ERJ6ENF2003V, "Res Thick Film 0805 200K Ohm 1% 1/8W ±100ppm/C Molded SMD Punched Carrier T/R", Case/Package=0805, Case Code (Metric)=2012, Manufacturer=Panasonic, Max Operating Temperature=155°C, Max Power Dissipation=125mW, Min Operating Temperature=-55°C, Package Quantity=1, Resistance=200kR, Supplier Part Number 1=P200KCDKR-ND, Temperature Coefficient=100ppm/°C, Tolerance=1%, Voltage Rating=150V, Case Code (Imperial)=0805, ComponentLink1Description=http://components.arrow.com/part/dataview/3986166S2126568N1386, ComponentLink1URL=http://components.arrow.com/part/dataview/3986166S2126568N1386, ComponentLink2Description=http://www.mouser.com/ds/2/315/AOA0000CE2-37512.pdf, ComponentLink2URL=http://www.mouser.com/ds/2/315/AOA0000CE2-37512.pdf, ComponentLink3Description=http://www.farnell.com/datasheets/1911175.pdf, ComponentLink3URL=http://www.farnell.com/datasheets/1911175.pdf, ComponentLink4Description=http://www.farnell.com/datasheets/1678782.pdf, ComponentLink4URL=http://www.farnell.com/datasheets/1678782.pdf, ComponentLink5Description=http://industrial.panasonic.com/www-data/pdf/AOA0000/AOA0000CE2.pdf, ComponentLink5URL=http://industrial.panasonic.com/www-data/pdf/AOA0000/AOA0000CE2.pdf, Composition="Thick Film", Contact Plating=Tin, Depth=1.25mm, Features="Automotive AEC-Q200", Height=0.6mm, Lead Free="Lead Free", Length=2mm, Manufacturer Part Number=ERJ6ENF2003V, Military Standard=Not, Mount="Surface Mount", Number of Terminations=2, Packaging="Tape and Reel", Power Rating=125mW, Pricing 1="1=0.1, 10=0.081, 100=0.0311, 1000=0.0137, 2500=0.0118 (USD)", Radiation Hardening=No, REACH SVHC="No SVHC", Stock 1=488340, Supplier 1=Digi-Key, Termination=SMD/SMT, Voltage Rating (DC)=150V, Width=1.2mm
R8 R13: library part ERJ6GEYJ103V, "Res Thick Film 0805 10K Ohm 5% 0.125W(1/8W) ±200ppm/C Molded SMD Automotive Punched T/R", Case/Package=0805, Case Code (Metric)=2012, Manufacturer=Panasonic, Max Operating Temperature=155°C, Max Power Dissipation=125mW, Min Operating Temperature=-55°C, Package Quantity=5000, Resistance=10kR, Supplier Part Number 1=P10KADKR-ND, Temperature Coefficient=200ppm/°C, Tolerance=5%, Voltage Rating=150V, Case Code (Imperial)=0805, ComponentLink1Description=http://www.farnell.com/datasheets/1500035.pdf, ComponentLink1URL=http://www.farnell.com/datasheets/1500035.pdf, ComponentLink2Description=http://www.farnell.com/datasheets/2059623.pdf, ComponentLink2URL=http://www.farnell.com/datasheets/2059623.pdf, ComponentLink3Description=http://www.alliedelec.com/m/d/51cd0790071e1666bdb9d00c57fcf960.pdf, ComponentLink3URL=http://www.alliedelec.com/m/d/51cd0790071e1666bdb9d00c57fcf960.pdf, ComponentLink4Description=http://industrial.panasonic.com/www-data/pdf/AOA0000/AOA0000CE1.pdf, ComponentLink4URL=http://industrial.panasonic.com/www-data/pdf/AOA0000/AOA0000CE1.pdf, ComponentLink5Description=http://www.farnell.com/datasheets/1678796.pdf, ComponentLink5URL=http://www.farnell.com/datasheets/1678796.pdf, ComponentLink6Description=http://www.farnell.com/datasheets/2371628.pdf, ComponentLink6URL=http://www.farnell.com/datasheets/2371628.pdf, Composition="Thick Film", Contact Plating=Tin, Depth=1.25mm, Features="Automotive AEC-Q200", Height=0.6mm, Lead Free="Lead Free", Length=2mm, Manufacturer Part Number=ERJ6GEYJ103V, Military Standard=Not, Mount="Surface Mount", Number of Terminations=2, Packaging="Tape and Reel", Power Rating=125mW, Pricing 1="1=0.1, 10=0.061, 100=0.0249, 1000=0.0112, 2500=0.0097 (USD)", Radiation Hardening=No, REACH SVHC="No SVHC", Stock 1=6308764, Supplier 1=Digi-Key, Termination=SMD/SMT, Voltage Rating (DC)=150V, Width=0.049inch
R9 R14 R15 R17 R18: library part RES
U1: "IC MAIN PWR CTRLR QUAD 32-QFN", Case/Package=QFN, Manufacturer=Intersil, Max Operating Temperature=100°C, Min Operating Temperature=-40°C, Output Current=20A, Package Quantity=60, Supplier Part Number 1=ISL6236AIRZ-ND, Switching Frequency=500kHz, ComponentLink1Description=http://www.intersil.com/content/dam/Intersil/documents/isl6/isl6236a.pdf, ComponentLink1URL=http://www.intersil.com/content/dam/Intersil/documents/isl6/isl6236a.pdf, Height=0.95mm, Lead Free="Lead Free", Length=5mm, Manufacturer Part Number=ISL6236AIRZ, Mount="Surface Mount", Number of Outputs=2, Packaging=Rail/Tube, Pricing 1="600=5.4796 (AUD)", Radiation Hardening=No, Stock 1=0, Supplier 1=Digi-Key, Width=5mm

## Via types
v1: diameter 0.45, hole 0.25, L1 to L6, 103 vias

## Nets (pads, with @x,y where several pads share a name; then routed paths per layer and width w, separated by ;. In a path a pad name is that pad's centre, name@x,y a point inside that pad or via, vN(x,y) a via of type N, cw(c..) or ccw(c..) an arc to the next point about the centre after c; other vN are vias at no path point)
+1V5: C9.1 J3.1 L1.1 R9.2 U1.10 | length 18.2
  L1 w0.3: L1.1@32.175,14.752 L1.1@33.142,13.785 ; J3.1@44.915,13.785 J3.1@45.225,13.475
  L3 w1: v1(29.725,20.325) 29.725,16.75 30.775,15.7 34.05,15.7 35.35,14.4 v1(35.35,13.825)
  L6 w0.2: U1.10@26.25,22.425 26.25,22.15 27.275,21.125
  L6 w0.5: 27.275,21.125 27.825,21.125 29.4,19.55 R9.2 v1(29.725,20.325)
+1V05: C10.1 J4.1 L2.2 U1.30 | length 14.7
  L1 w0.3: J4.1@44.74,35.74 J4.1
  L3 w0.5: v1(25.825,27.975) 26.625,28.775
  L3 w1: 26.625,28.775 27.075,29.225 27.075,30.9 32.401,36.226 v1(35.15,36.226)
  L6 w0.2: U1.30 25.75,27.9 v1(25.825,27.975)
+5V_LDO: C1.2 R1.2 U1.7 | length 24.2
  L3 w0.7: v1(12.725,25) 13.625,25.9 19.05,25.9 20.525,24.425 22.275,24.425 23.775,22.925 v1(29.45,22.925)
  L6 w0.2: U1.7 28.2,23.75 28.375,23.575 28.375,23.325
  L6 w0.5: v1(12.725,25) R1.2 ; 28.375,23.325 28.375,22.375 29.05,21.7 C1.2 v1(29.45,22.925)
+5V_PVCC: C3.2 R1.1 R2.2 R3.1 U1.19 | length 12.9
  L6 w0.15: R3.1@15.8,29.45 R3.1@15.825,29.475
  L6 w0.2: 21.05,24.25 U1.19
  L6 w0.5: C3.2@19.925,24.65 20.65,24.65 21.05,24.25
  L6 w0.7: R1.1 15.65,26.125 ; R3.1 15.65,26.125 ; C3.2@19.925,24.65 19.925,25.625 19.425,26.125 15.65,26.125
+5V_VCC: C4.2 R3.2 R8.1 R10.2 R11.2 R12.2 R13.1 R17.2 U1.2 U1.3 U1.20 | length 16.1
  L6 w0.2: v1(21.376,25.226) 21.799,25.226 22.275,24.75 U1.20@22.775,24.75 ; U1.3 27.825,25.75 28.414,26.339 28.414,27.861 ; U1.2 27.8,26.25 28,26.45 v1(28,27.1)
  L6 w0.3: R8.1@29.525,35.225 R8.1
  L6 w0.5: v1(12.725,29.625) 13.725,29.625 R3.2 ; v1(12.8,32.375) 13.725,32.375 R12.2 ; v1(12.8,34.775) 13.8,34.775 R11.2@13.825,34.8 ; v1(22.7,16.775) R13.1 ; v1(27.3,16.625) R10.2 ; R17.2@27.325,35.025 v1(28.15,35.025) ; v1(28.3,29.875) 28.302,29.873 C4.2 28.414,28.775 28.414,27.861 ; R8.1@29.525,35.225 v1(29.525,36.175)
+REF: C12.1 R15.2 U1.1 | length 9.2
  L6 w0.2: U1.1 27.4,27.525
  L6 w0.5: R15.2@27.377,32.827 R15.2 29.561,32.8 27.6,30.839 27.6,27.725 27.4,27.525
+VIN: C2.2 C5.2 C6.2 J1.1 Q1.8 Q2.8 R2.1 U1.6 | length 6.6
  L1 w0.3: Q1.8 Q1.8@18.75,17.028 ; C5.2 C5.2@18.75,20.3
  L6 w0.2: U1.6 29.535,24.25 C2.2
  L6 w0.5: v1(12.7,28.6) 12.7,27.7 13.1,27.3 R2.1 ; C2.2 29.873,24.173 30.45,24.75 v1(30.45,25.275)
+VREF3: C11.1 R16.2 U1.5 | length 23.9
  L6 w0.2: U1.5 28.2,24.75 28.475,25.025
  L6 w0.5: R16.2 R16.2@27.625,37.4 ; 28.475,25.025 29.688,26.238 C11.1
  L6 w0.9: R16.2@27.625,37.4 32.275,37.4 34.85,34.825 34.85,29.675 33.025,27.85 30.075,27.85 29.688,27.463 C11.1
EN1: R13.2 U1.14 | length 3.5
  L6 w0.15: R13.2 22.7,19.925 24.25,21.475 U1.14@24.25,22.425
EN_LDO: R8.2 U1.4 | length 16
  L6 w0.2: U1.4 27.825,25.25 28.95,26.375 28.95,27.875 29.775,28.7 32.6,28.7 33.775,29.875 33.775,33.85 32.45,35.175 31.525,35.175 R8.2@31.45,35.1
FB1: R9.1 R10.1 R14.2 U1.11 | length 9.6
  L6 w0.15: 25.75,21.65 U1.11@25.75,22.425 ; R10.1@27.325,19.525 R10.1@27.325,19.55
  L6 w0.4: 25.75,21.65 27.3,20.1 R10.1 R10.1@27.325,19.55
  L6 w0.5: R10.1 27.325,19.525 28.05,19.525 28.525,19.05 28.525,18.025 28.9,17.65 R9.1 R14.2
GND: C1.1 C2.1 C3.1 C4.1 C5.1 C6.1 C9.2 C10.2 C11.2 C12.2 J2.1 J5.1 J6.1 Q1.2 Q1.3 Q2.2 Q2.3 R6.2 R7.2 R14.1 R18.1 U1.8 U1.21 U1.22 U1.29 U1.33 | length 13.9
  L1 w0.2: J2.1@5,19 J2.1
  L1 w0.5: C9.2@37.744,19.185 C9.2@38.184,19.625
  L6 w0.2: U1.21 U1.33@24.75,25.25 ; U1.22 22.8,25.55 24.45,25.55 U1.33@24.75,25.25 ; U1.33 U1.33@24.75,25.25 ; v1(25,28.2) 25.25,27.95 U1.29 ; U1.8 27.4,22.125 v1(27.575,21.95)
  L6 w0.3: C3.1@18.058,24.658 C3.1@18.125,24.725 ; R6.2@25.825,30.725 R6.2@25.825,30.85 ; C12.2@31.55,32.8 v1(32.7,32.8)
  L6 w0.4: R6.2 25.8,31.575 v1(25.825,31.6)
  L6 w0.5: v1(25,16.775) R7.2 ; R18.1@27.35,39.675 v1(28.45,39.675) ; R14.1@32.025,19.525 32.05,19.55 v1(33.075,19.55)
  other v1: 7.5,8.5 10,8.5 8.75,9.5 7.5,10.5 10,10.5 8.75,11.5 7.5,12.5 10,12.5 8.75,13.5 12.5,14.25 7.5,14.5 9.75,14.5 8.75,15.5 12.5,15.5 7.5,16.5 9.75,16.5 36.2,18.9 39.7,18.9 14.775,18.975 14.775,19.975 36.2,20.6 39.7,20.6 14.775,20.975 33.45,21.3 33.45,22.1 37.1,22.1 38.9,22.1 32.4,23.775 24,24 26,24 17,24.45 32.4,24.575 16.625,24.975 26,26 24.125,26.075 32.45,26.1 32.45,26.9 37.1,28 38.9,28 32.25,29.5 36.2,29.5 39.5,29.5 32.25,30.3 36.2,31.2 39.45,31.2 7.5,32.5 10,32.5 8.75,33.5 7.5,34.5 10,34.5 8.75,35.5 7.5,36.5 10,36.5 8.75,37.5 12.5,38.25 7.5,38.5 10,38.5 8.75,39.5 12.5,39.5 7.5,40.5 10,40.5 19.6,43 19.6,44 19.6,45
LGATE1: Q1.4 U1.18 | length 22.9
  L1 w0.5: v1(12.23,12.995) Q1.4
  L3 w1: v1(12.23,12.995) 11.48,12.995 10.75,13.725 10.75,20.375 13.425,23.05 v1(21.15,23.05)
  L6 w0.2: v1(21.15,23.05) 21.25,23.05 21.95,23.75 U1.18
LGATE2: Q2.4 U1.23 | length 19.9
  L1 w0.5: v1(11.9,37) Q2.4@13.523,37
  L3 w1: v1(11.9,37) 13.45,37 14.35,36.1 14.35,31.1 17.975,27.475 20.375,27.475 v1(21.6,26.25)
  L6 w0.2: v1(21.6,26.25) U1.23@22.8,26.25
NetC7_2: C7.2 R4.1 | length 2.4
  L6 w0.2: C7.2 17.912,21.137 18.15,21.375 R4.1
NetC8_1: C8.1 R5.2 | length 2.4
  L6 w0.2: C8.1 17.888,28.662 18.05,28.5 R5.2
NetR4_2: R4.2 U1.17 | length 2.9
  L6 w0.2: R4.2@20.05,22.3 21.375,22.3 22.325,23.25 U1.17
NetR5_1: R5.1 U1.24 | length 2.9
  L6 w0.2: R5.1 20.85,27.4 21.5,26.75 U1.24
NetR6_1: R6.1 U1.31 | length 1.8
  L6 w0.2: R6.1 26.275,28.475 26.275,27.425 U1.31
NetR7_1: R7.1 U1.12 | length 3.2
  L6 w0.2: R7.1 25,21 25.25,21.25 U1.12
PHASE1: C7.1 L1.2 Q1.5 Q1.6 Q1.7 U1.16 | length 9.6
  L3 w1: v1(19.525,15.3) 19.812,15.587 v1(19.812,18.287)
  L6 w0.2: 22.5,22.1 23,22.6 U1.16
  L6 w0.4: v1(19.812,18.287) C7.1 19.812,20.512 20.325,21.025 21.425,21.025 22.5,22.1
PHASE2: C8.2 L2.1 Q2.5 Q2.6 Q2.7 U1.25 | length 12.2
  L3 w1: v1(19.725,31.375) v1(19.725,37.025)
  L6 w0.2: U1.25 23.25,28.175
  L6 w0.4: v1(19.725,31.375) 19.725,29.79 C8.2 21.698,29.727 23.25,28.175
POK1: R12.1 U1.13 U1.27 | length 38.9
  L3 w0.15: v1(22.6,32.375) 22.6,31.95 24.225,30.325 24.225,27.525 25.2,26.55 30.275,26.55 30.975,25.85 30.975,22.4 29.8,21.225 25.15,21.225 v1(24.35,20.425)
  L6 w0.15: R12.1 22.975,32.4 24.25,31.125 U1.27 ; v1(24.35,20.425) 24.35,20.95 24.75,21.35 U1.13@24.75,22.425
POK2: R11.1 U1.28 | length 14.9
  L6 w0.15: R11.1@15.65,34.625 15.825,34.8 21.825,34.8 24.575,32.05 24.575,27.95 24.75,27.775 U1.28
REFIN2: R15.1 R16.1 R17.1 R18.2 U1.32 | length 13.1
  L6 w0.2: U1.32 26.75,28.2 26.9,28.35
  L6 w0.4: R18.2 R16.1 R17.1 R15.1 25.675,32.8 26.9,31.575 26.9,28.35
UGATE1: Q1.1 U1.15 | length 15.6
  L1 w0.5: v1(12.3,16.825) Q1.1@13.698,16.825
  L3 w1: v1(12.3,16.825) 14.5,16.825 17.825,20.15 22.25,20.15 v1(23.475,21.375)
  L6 w0.2: v1(23.475,21.375) 23.75,21.65 U1.15@23.75,22.425
UGATE2: Q2.1 U1.26 | length 23.6
  L1 w0.5: v1(11.975,40.8) Q2.1@13.573,40.8
  L3 w1: v1(11.975,40.8) 14.45,40.8 17.1,38.15 17.1,31.8 19.2,29.7 v1(23.1,29.7)
  L6 w0.2: v1(23.1,29.7) 23.1,29.575 23.75,28.925 U1.26
pads on no net: U1.9

## Polygon pours and split planes (outlines as drawn)
GND on L1 "L1-GND 2" (solid, pour order 58): 14.1,15.9 11.3,15.9 11.3,17.4 6.4,17.4 6.4,8.1 11.3,8.1 11.3,14 14.1,14
+VIN on L1 "L1-+VIN" (solid, pour order 14): 21.9,16.4 21.9,25.5 10.875,25.5 9.612,26.762 9.612,28.3 10.875,28.3 27.2,28.3 27.2,24.8 31.5,24.8 31.5,31.8 6.275,31.8 6.275,41.4 14.9,41.4 14.9,40.375 19.2,40.375 19.2,41.8 17.2,41.8 17.2,46.1 3,46.1 2.9,46.1 2.55,46.1 2.55,26.6 3.775,26.6 8.375,22 17.8,22 17.8,16.4
+1V5 on L1 "L1-+1V5" (solid, pour order 6): 29.7,9.3 39,9.3 39,1.3 47,1.3 47,9.3 47,16.2 29.7,16.2
GND on L1 "L1-GND 2" (solid, pour order 48): 14.1,39.8 11.3,39.8 11.3,41.3 6.4,41.3 6.4,32 11.3,32 11.3,37.9 14.1,37.9
GND on L1 "L1-GND 3" (solid, pour order 36): 40,22.5 35.9,22.5 35.9,17.7 40,17.7
GND on L1 "L1-GND 4" (solid, pour order 28): 35.9,27.7 39.8,27.7 39.8,32.263 35.9,32.263
GND on L1 "L1-GND" (solid, pour order 26): 16.1,21.3 14.4,21.3 14.4,18.625 16.1,18.625
GND on L1 "L1-GND 1" (solid, pour order 24): 18.3,42.625 19.95,42.625 19.95,45.35 18.3,45.35
PHASE2 on L1 "L1-PHASE2" (solid, pour order 20): 20.1,34.4 24.2,34.4 24.2,39.95 17.9,39.95 17.9,36.6
PHASE2 on L1 "L1-PHASE2 1" (solid, pour order 18): 20.275,34.35
PHASE2 on L1 "L1-PHASE2 2" (solid, pour order 16): 20.275,34.35
+VIN on L1 "L1-+VIN 1" (solid, pour order 10): 17.8,16.4
+1V05 on L1 "L1-+1V05" (solid, pour order 8): 29.825,33.725 47.125,33.725 47.125,42.1 47.125,48.95 39.125,48.95 39.125,42.1 29.825,42.1
PHASE1 on L1 "L1-PHASE1" (solid, pour order 4): 23.75,10 19.75,10 17.9,11.85 17.9,15.8 23.75,15.8
no net on L6 "L6-No Net" (solid, pour order 60): 6,46
GND on L6 "L6-GND" (solid, pour order 46): 18.45,25.375 16.375,25.375 16.375,24.075 18.45,24.075
GND on L6 "L6-GND 1" (solid, pour order 44): 32.1,20.9 33.7,20.9 33.7,22.5 32.1,22.5
GND on L6 "L6-GND 2" (solid, pour order 42): 31.05,23.475 32.65,23.475 32.65,24.875 31.05,24.875
GND on L6 "L6-GND 3" (solid, pour order 40): 31.1,25.8 32.7,25.8 32.7,27.2 31.1,27.2
GND on L6 "L6-GND 4" (solid, pour order 38): 30.9,29.2 32.5,29.2 32.5,30.6 30.9,30.6
+5V_VCC on L4 "L4-+5V_VCC" (solid, pour order 54): 8,46 8,3 42,3 42,46
GND on L2(GND) (split plane): 49.49,0.51 0.51,0.51 0.51,49.49 49.49,49.49
GND on L5(GND) (split plane): 49.49,0.51 0.51,0.51 0.51,49.49 49.49,49.49

## Other copper
L1:
  text "DJR TECH" at 4.1,2.8 h1.3

## Silkscreen, mask and mechanical layers (free items; w line width, h text height)
Top Overlay:
  text "1" at 12.4,42.5 h1.52 r270
  text "OUT2" at 42.9,38.6 h1.3
  text "+VIN" at 2,32.8 h1.52
  text "GND" at 43.3,26.2 h1.3
  text "GND" at 43.3,22.5 h1.3
  text "1" at 12.7,18.4 h1.52 r270
  text "OUT1" at 43,10.1 h1.3
Bottom Overlay:
  text "FONTE CHAVEADA ISL6236A" at 39,47 h1.3
  text "1" at 28.4,27 h1
  text "(C) Eng. Didan Ribeiro" at 48.425,2.825 h1.3
Top Solder:
  text "DJR TECH" at 4.1,2.8 h1.3
Board Outline:
  the board outline again, w0.254